# Altium PCB PCB1_Layout_Final.PcbDoc (part 1 of 2)
Units mm, origin at the board's own origin, x right, y up, seen from the top; angles counter-clockwise.
Board outline 31.5 x 45 mm, 4 copper layers (Top Layer, Ground, Power, Bottom Layer), stack 0.641 mm thick; 56 components, 34 nets, 168 pads, 132 vias.
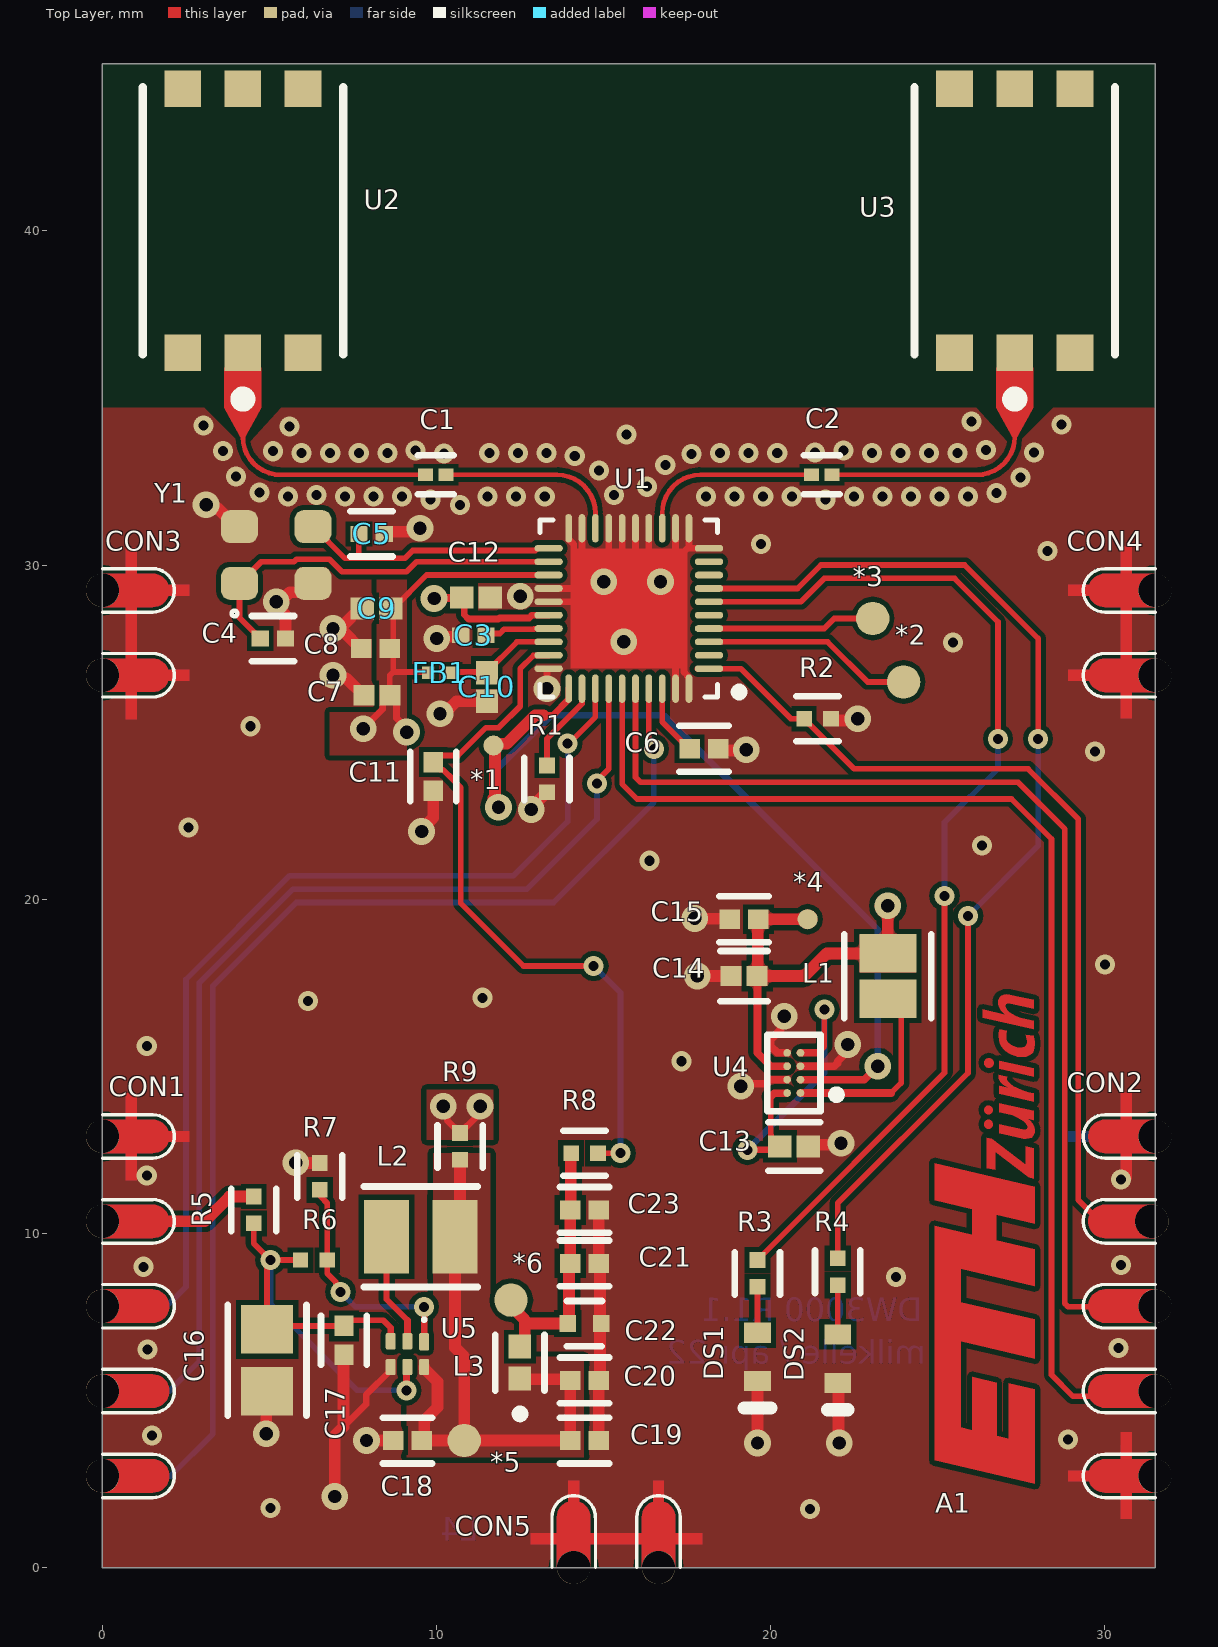
[diagram p0: Top Layer view]
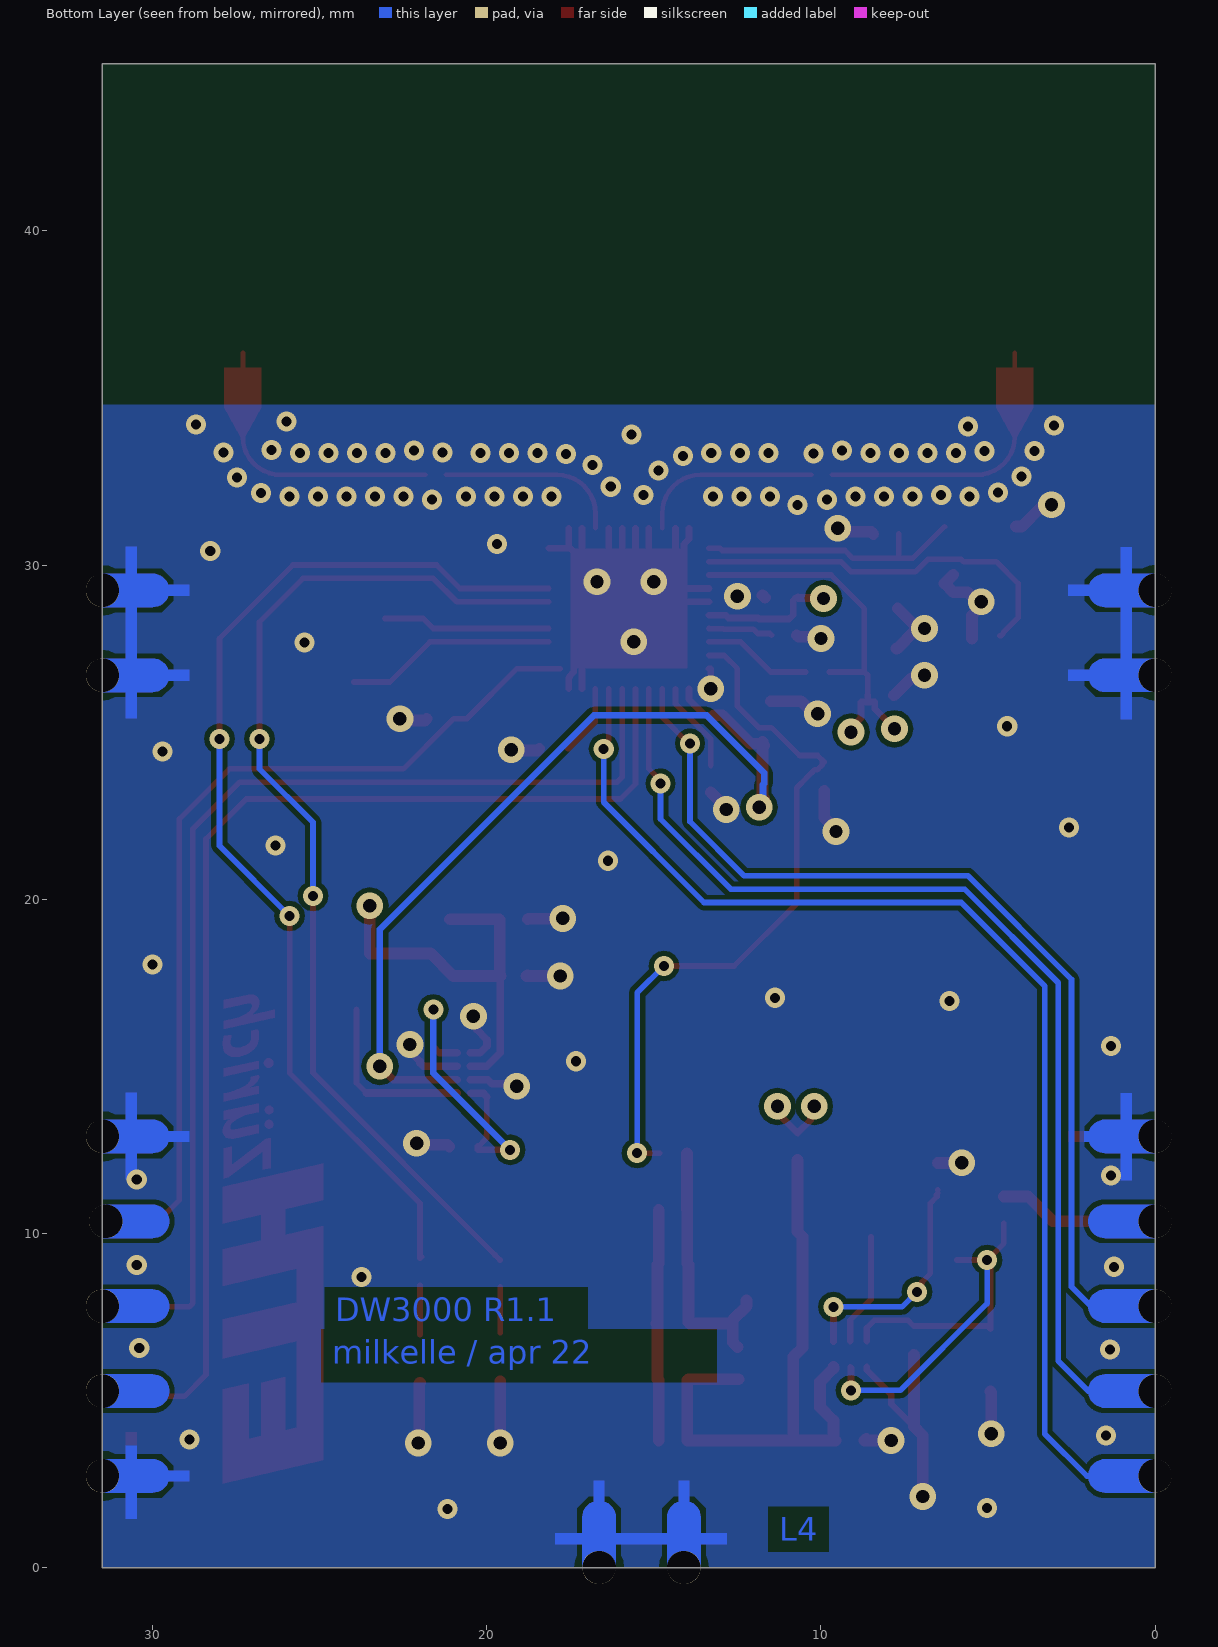
[diagram p1: Bottom Layer view, seen from below]
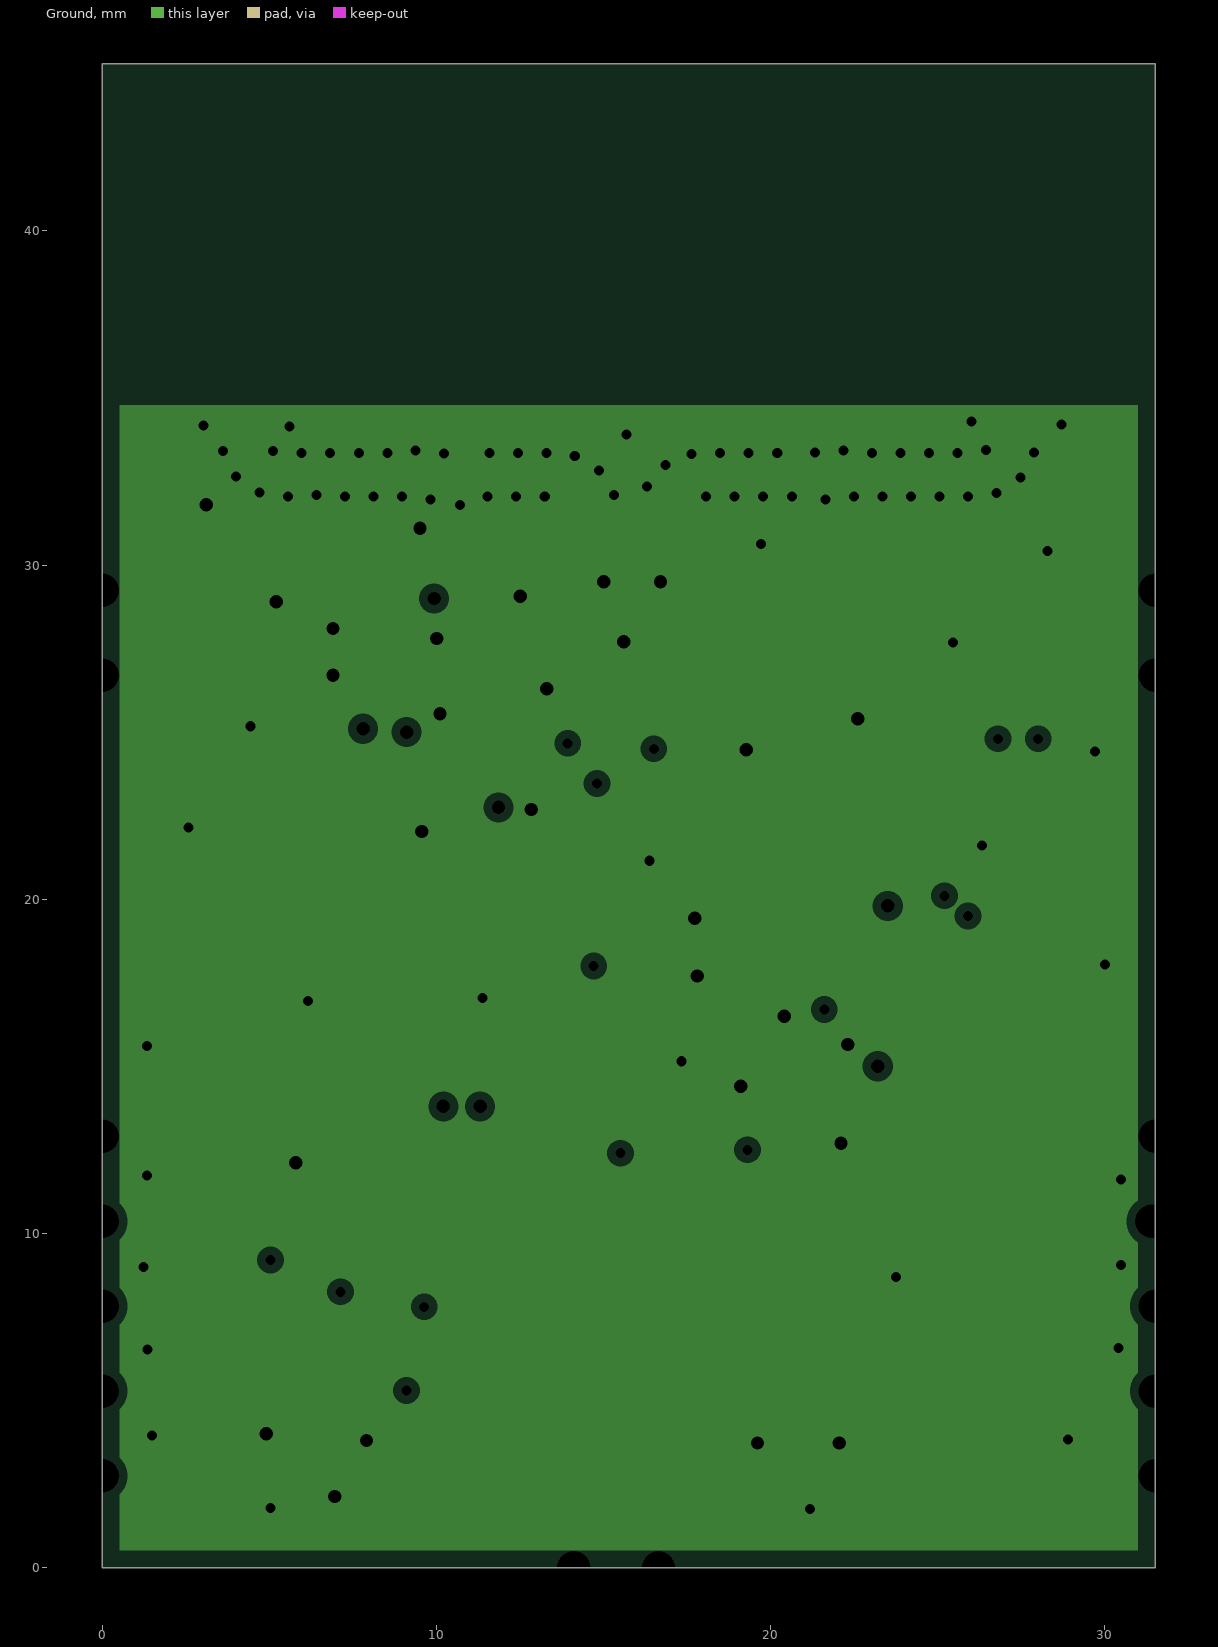
[diagram p2: Ground, clearances drawn from the general rule]
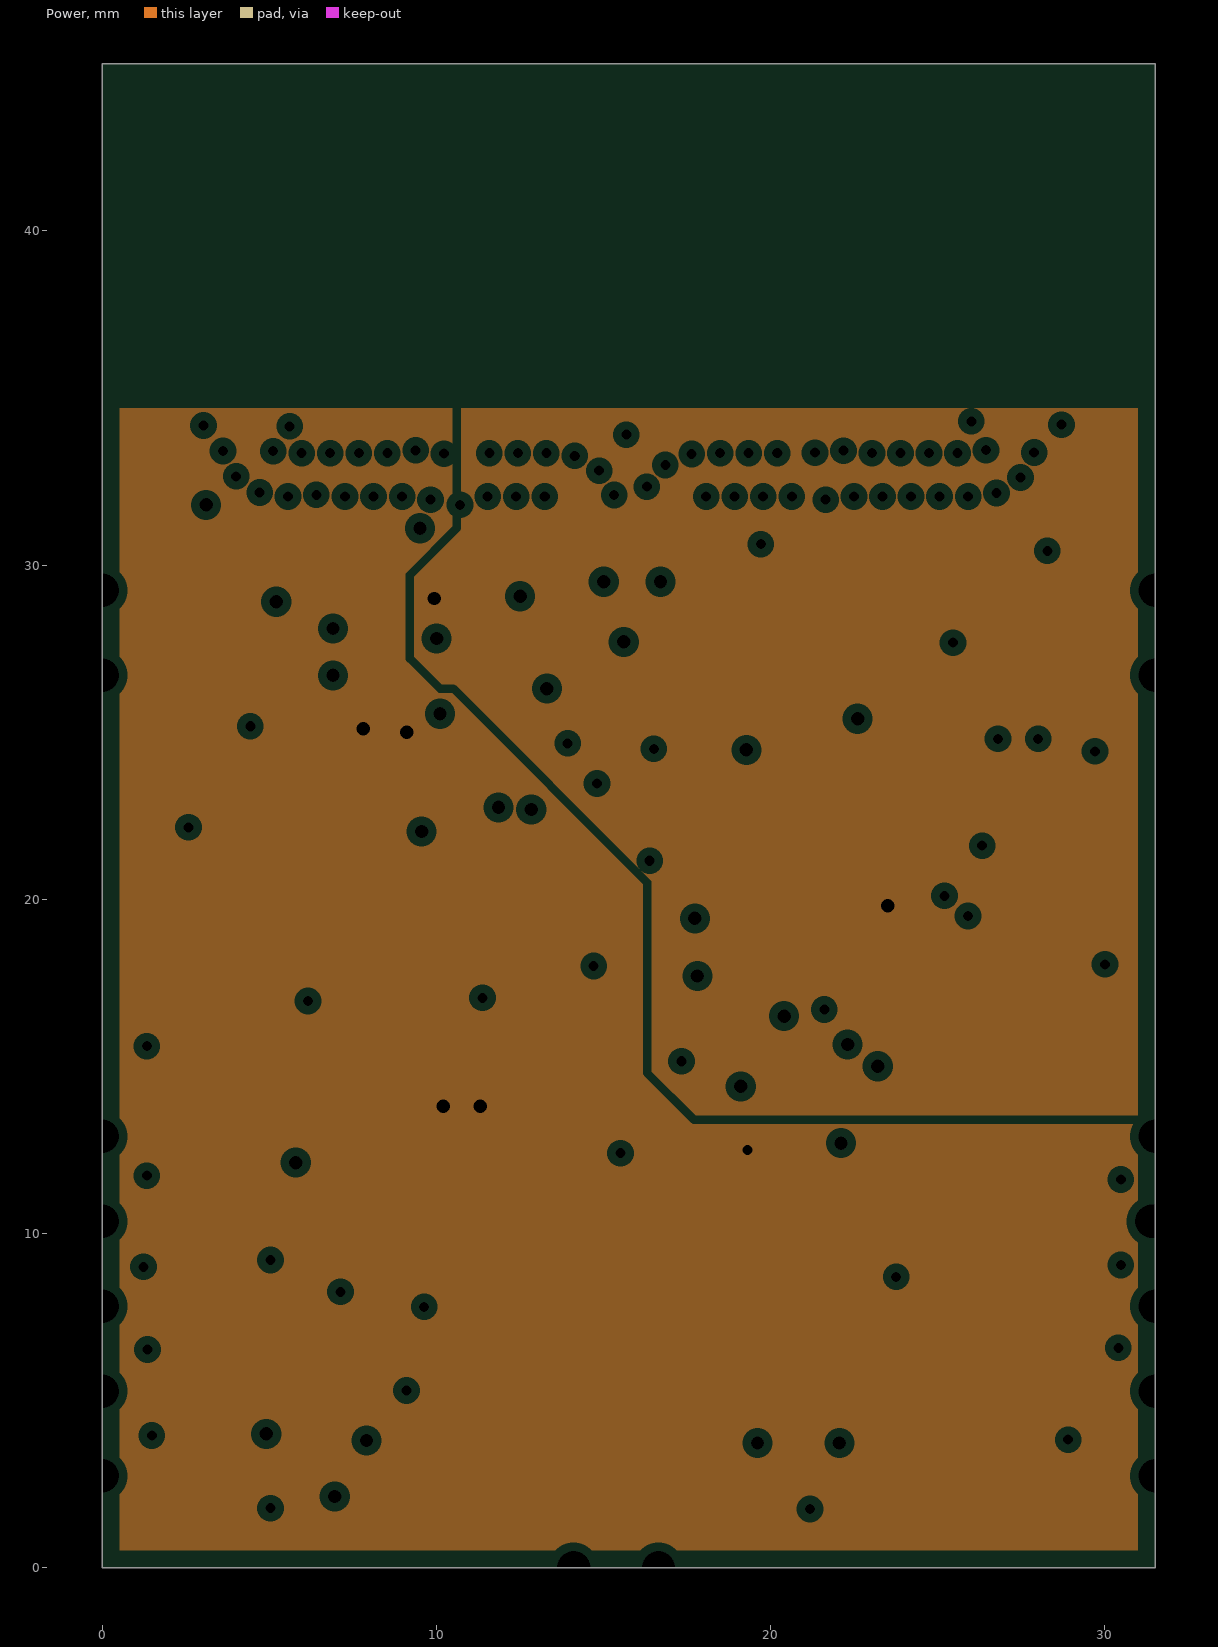
[diagram p3: Power, clearances drawn from the general rule]
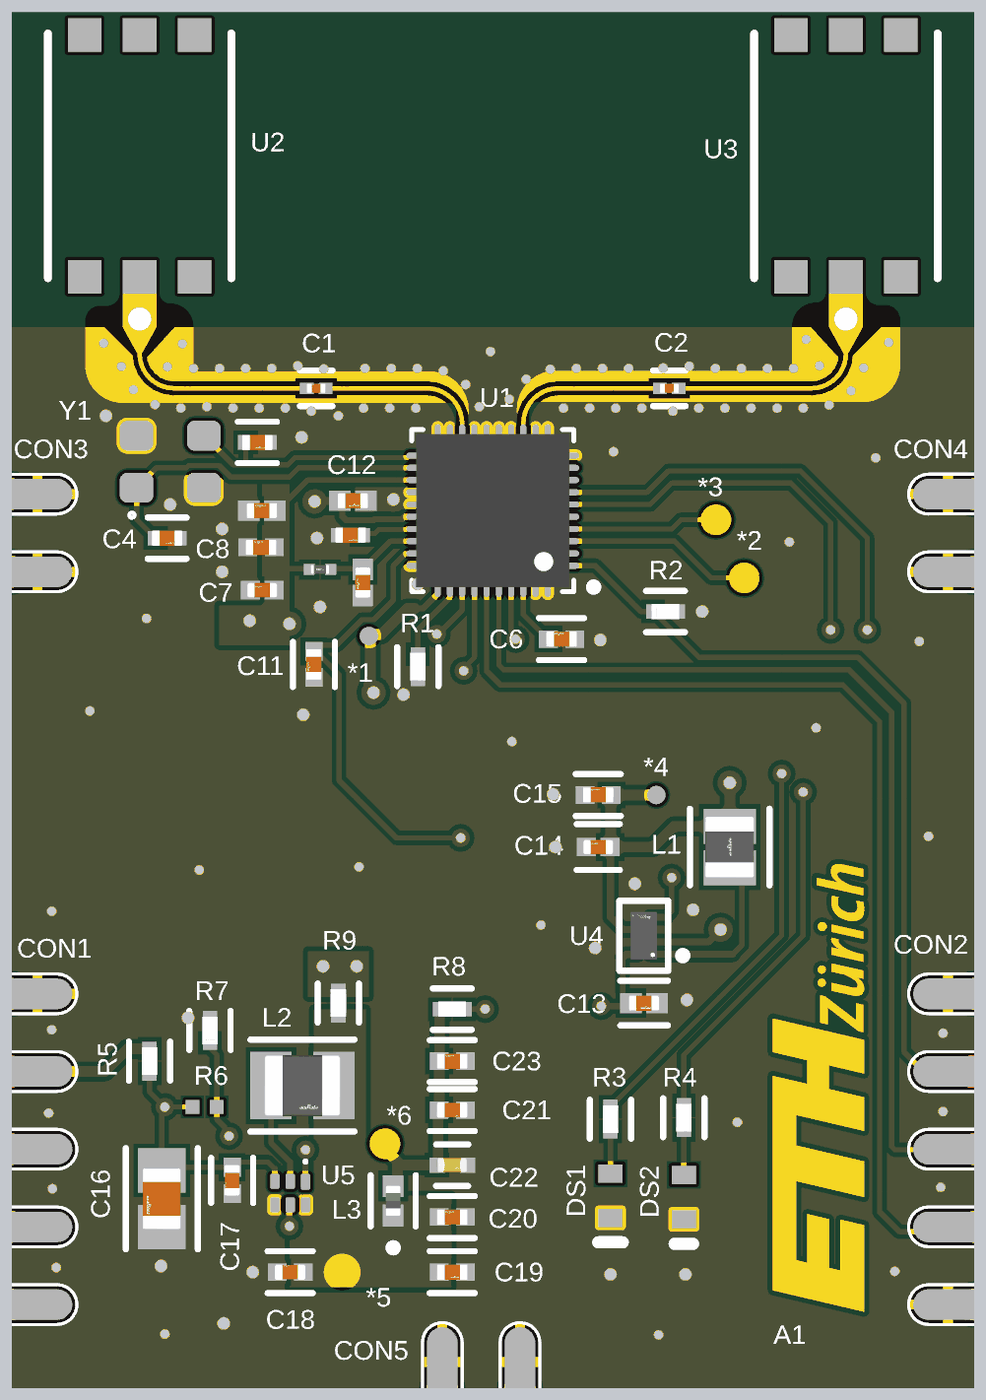
[diagram p4: 3D render of the assembled board from above, using the file's embedded part models]

## Layer stack, top to bottom
Top Solder: solder mask 0.0102, Solder Resist, Dk 3.5
Top Layer: signal copper 0.0356
Dielectric 2: prepreg 0.09, Megtron 4, Dk 3.5
Ground: plane copper 0.035, net GND
Dielectric 1: dielectric 0.32, Megtron 4, Dk 4.1
Power: plane copper 0.035, net (Multiple Nets)
Dielectric 3: prepreg 0.09, Megtron 4, Dk 3.5
Bottom Layer: signal copper 0.0356
Bottom Solder: solder mask 0.0102, Solder Resist, Dk 3.5

## Board outline
0,0 31.5,0 31.5,45 0,45

## Design rules (kind name [scope] priority, off if disabled: settings)
Clearance [All] p1: gap=0.15 ignorepadtopadclearanceinfootprint=FALSE
MinimumSolderMaskSliver [All] p1: minsoldermaskwidth=0.1
PlaneClearance [All] p1: clearance=0.25
PlaneConnect PlaneConnect_1 [All] p1: planeconnectstyle=Direct reliefexpansion=0.508 reliefentries=4 reliefconductorwidth=0.254 reliefairgap=0.254
PolygonConnect PolygonConnect_1 [All] p1: thpad.connectstyle=Relief thpad.reliefconductorwidth=0.254 thpad.reliefentries=4 thpad.polygonreliefangle="90 Angle" thpad.airgapwidth=0.254 smdpad.connectstyle=Direct smdpad.reliefconductorwidth=0.254 smdpad.reliefentries=4 smdpad.polygonreliefangle="90 Angle" smdpad.airgapwidth=0.254 via.connectstyle=Direct via.reliefconductorwidth=0.254 via.reliefentries=4 via.polygonreliefangle="90 Angle" via.airgapwidth=0.254
RoutingVias RoutingVias_Power [(InNet('AVDD') OR InNet('GND') OR InNet('VDD') OR InNet('VCOM') OR InNet('EN_VDD3') OR InNet('VDD3') OR InNet('AVDD'))] p1: holewidth=0.3 width=0.6 viastyle="Through Hole" minholewidth=0.3 minwidth=0.6 maxholewidth=0.4 maxwidth=0.8
RoutingVias [All] p2: holewidth=0.3 width=0.6 viastyle="Through Hole" minholewidth=0.3 minwidth=0.6 maxholewidth=0.3 maxwidth=0.6
SolderMaskExpansion SolderMaskExpansion_1 [IsVia] p1: expansion=0.102 istentingtop=TRUE
SolderMaskExpansion [All] p2: expansion=0.102 istentingtop=FALSE
Width RF [InNetClass('RF')] p1: maxlimit=0.2 minlimit=0.106 preferedwidth=0.153 impedanceprofiledriven=TRUE impedanceprofileid={21F144F7-80B2-48E0-8457-C32B2D776980} impedanceprofilevalue=50.000000 minimp=50.000000 maximp=50.000000 favimp=50.000000 // RF Impedance
Width Width_Power [(InNet('AVDD') OR InNet('GND') OR InNet('VDD') OR InNet('VCOM') OR InNet('EN_VDD3') OR InNet('VDD3') OR InNet('AVDD'))] p2: maxlimit=0.4 minlimit=0.2 preferedwidth=0.35
Width [All] p3: maxlimit=0.3 minlimit=0.15 preferedwidth=0.17
27 further rules are at their usual default settings.

## Classes and differential pairs
net class RF: NetC1_1 NetC1_2 NetC2_1 NetC2_2
component class DW3000: *1 *2 *3 *4 C1 C2 C3 C4 C5 C6 C7 C8 C9 C10 C11 C12 C13 C14 C15 DS1 DS2 FB1 L1 R1 R2 R3 R4 U1 U2 U3 U4 Y1
component class Deck: *5 *6 A1 C16 C17 C18 C19 C20 C21 C22 C23 CON1 CON2 CON3 CON4 CON5 L2 L3 R5 R6 R7 R8 R9 R13 TP1 TP2 U5

## Components (designator, comment, footprint, x,y, rotation, side; value= is the part's Value field where it differs from the comment)
*1 "EN_VDD3" Pad-0.6mm 11.7,24.6 r0 top
*2 "RXOK" Pad-1mm 23.975,26.5 r0 top
*3 "SFD_OK" Pad-1mm 23.05,28.4 r0 top
*4 "VDD3" Pad-0.6mm 21.1,19.4 r0 top
*5 "VDD" Pad-1mm 10.826,3.8 r0 top
*6 "AVDD" Pad-1mm 12.226,8 r90 top
A1 "Logo ETH Zurich" eth-zurich_3mm 27.9,2.5 r90 top
C1 "GJM0335C1E2R0WB01D" FP-GJM033-0_03-IPC_B 9.975,32.7 r180 top
C2 "GJM0335C1E2R0WB01D" FP-GJM033-0_03-IPC_B 21.525,32.7 r0 top
C3 "GRM155R71C224KA12D" FP-GRM155-0_05-IPC_C 11.1,27.9 r0 top
C4 "GJM1555C1H3R3BB01D" FP-GJM155-0_05-IPC_C 5.1,27.8 r0 top
C5 "GJM1555C1H3R3BB01D" FP-GJM155-0_05-IPC_C 8.052,30.931 r0 top
C6 "GRM155R71E104ME14D" FP-GRM155-0_05-IPC_B 18,24.5 r180 top
C7 "GRM155R60J106ME47D" FP-GRM155-0_2-0_1-IPC_C 8.211,26.1 r180 top
C8 "GRM155R71E104ME14D" FP-GRM155-0_05-IPC_B 8.171,27.5 r180 top
C9 "GRM1555C1H472GE01D" FP-GRM155-0_15-IPC_B 8.2,28.7 r180 top
C10 "GRM1555C1H472GE01D" FP-GRM155-0_15-IPC_B 11.5,26.35 r270 top
C11 "GRM155R71E104ME14D" FP-GRM155-0_05-IPC_B 9.9,23.671 r270 top
C12 "GRM1555C1H472GE01D" FP-GRM155-0_15-IPC_B 11.175,29.025 r0 top
C13 "GRM155C80J475MEAAD" FP-GRM155-0_15-IPC_B 20.7,12.6 r0 top
C14 "GRM155R60J106ME47D" FP-GRM155-0_2-0_1-IPC_C 19.2,17.7 r180 top
C15 "GRM155R71E104ME14D" FP-GRM155-0_05-IPC_B 19.2,19.4 r180 top
C16 "GRM21BR60J107ME15L" FP-GRM21B-0_2-e0_2_0_7-IPC_A 4.926,6.2 r270 top
C17 "GRM155R60J475ME47D" FP-GRM155-0_1-IPC_B 7.226,6.8 r270 top
C18 "GRM155R60J475ME47D" FP-GRM155-0_1-IPC_B 9.126,3.8 r180 top
C19 "GRM1555C1H102JA01D" FP-GRM155-0_05-IPC_B 14.426,3.8 r0 top
C20 "GRM155R71E104ME14D" FP-GRM155-0_05-IPC_B 14.426,5.6 r180 top
C21 "GRM155R60J475ME47D" FP-GRM155-0_1-IPC_B 14.426,9.1 r0 top
C22 "CC0402KRX7R7BB103" FP-CC0402-MFG 14.426,7.3 r0 top value="10 nF"
C23 "GRM155R71E104ME14D" FP-GRM155-0_05-IPC_B 14.426,10.7 r180 top
CON1 "Con_Pad" Cons_Pad#1 0,12.9 r270 top
CON2 "Con_Pad" Cons_Pad#2 31.5,12.9 r270 top
CON3 "Con_Pad_GND" PCBComponent_1 0,29.242 r270 top
CON4 "Con_Pad_GND" PCBComponent_1 31.5,26.7 r90 top
CON5 "Con_Pad_GND" PCBComponent_1 14.1,0 r0 top
DS1 "TLMS1100-GS08" VISH-TLMX1100_V 19.6,6.3 r270 top
DS2 "TLMY1100-GS08" VISH-TLMX1100-2_V 22,6.25 r270 top
FB1 "MPZ0603S330HT000" FP-MPZ0603-IPC_B 10.1,26.775 r0 top
L1 "1285AS-H-2R2M=P2" FP-DFE201610C-IPC_C 23.5,17.7 r90 top
L2 "LQM2HPN1R0MJ0L" FP-LQM2HPN_J0-IPC_B 9.526,9.9 r0 top
L3 "LQG15HS3N6B02D" FP-LQG15HH_02-IPC_A 12.494,6.133 r90 top
R1 "CRCW0402100KFKED" FP-CRCW0402-e3-IPC_C 13.3,23.6 r90 top
R2 "CRCW0402100KFKED" FP-CRCW0402-e3-IPC_C 21.398,25.4 r180 top
R3 "" FP-CRCW0402-e3-IPC_C 19.6,8.802 r90 top
R4 "" FP-CRCW0402-e3-IPC_C 22,8.85 r90 top
R5 "CRCW04020000Z0ED" FP-CRCW0402-e3-IPC_C 4.526,10.7 r270 top
R6 "CPF0402B47K5E1" RESC1005X35X20LL05T10 6.326,9.2 r180 top
R7 "CRCW04020000Z0ED" FP-CRCW0402-e3-IPC_C 6.5,11.702 r90 top
R8 "CRCW04020000Z0ED" FP-CRCW0402-e3-IPC_C 14.426,12.4 r180 top
R9 "CRCW04020000Z0ED" FP-CRCW0402-e3-IPC_C 10.7,12.6 r270 top
U1 "DW3220" QFN40P500X500X40_HS-40N 15.75,28.7 r180 top
U2 "AH086M555003-T" AH086M 4.2,40.3 r0 top
U3 "AH086M555003-T" AH086M 27.3,40.3 r0 top
U4 "TPS62743YFPR" FP-YFP0008-C01-MFG 20.689,14.8 r180 top
U5 "TPS62233DRYR" DRY0006A 9.126,6.385 r270 top
Y1 "8Y38472012" OSCSC320X250X100N 5.2,30.3 r90 top value="38.4 MHz"

## Footprints (in the part's own frame and the unit in brackets; to place one, negate y for a bottom-side part, rotate by r counter-clockwise, add the part's x,y. Pads: shape width x height; smd on the part's side, far side on the other; paste and mask are expansions set on the pad)
AH086M [mm] "RF ANT CHIP SLD"
  rect 1.1x1.1 smd: 1(0,-3.95) ""(-1.8,-3.95) ""(-1.8,3.95) ""(0,3.95) ""(1.8,-3.95) ""(1.8,3.95)
  silkscreen extent -3,-5.46 3,4, body extent -3,-4 3,4, height 1
Cons_Pad#1 [mm]
  round 1 hole 1: 0(0,0) 1(2.54,0) 2(5.08,0) 3(7.62,0) 4(10.16,0)
  Multi-Layer region: 2.04,0 2.04,1.5 2.09,1.717 2.228,1.891 2.429,1.987 2.651,1.987 2.852,1.891 2.99,1.717 3.04,1.5 3.04,1.5 3.04,0
  Multi-Layer region: -0.5,0 -0.5,1.5 -0.45,1.717 -0.312,1.891 -0.111,1.987 0.111,1.987 0.312,1.891 0.45,1.717 0.5,1.5 0.5,1.5 0.5,0
  Multi-Layer region: 4.58,0 4.58,1.5 4.63,1.717 4.768,1.891 4.969,1.987 5.191,1.987 5.392,1.891 5.53,1.717 5.58,1.5 5.58,1.5 5.58,0
  Multi-Layer region: 7.12,0 7.12,1.5 7.17,1.717 7.308,1.891 7.509,1.987 7.731,1.987 7.932,1.891 8.07,1.717 8.12,1.5 8.12,1.5 8.12,0
  Multi-Layer region: 9.66,0 9.66,1.5 9.71,1.717 9.848,1.891 10.049,1.987 10.271,1.987 10.472,1.891 10.61,1.717 10.66,1.5 10.66,1.5 10.66,0
  silkscreen extent -0.65,0 10.81,2.15
Cons_Pad#2 [mm]
  round 1 hole 1: 0(0,0) 1(2.54,-0.1) 2(5.08,0) 3(7.62,0) 4(10.16,0)
  Multi-Layer region: 2.04,0 2.04,-1.5 2.09,-1.717 2.228,-1.891 2.429,-1.987 2.651,-1.987 2.852,-1.891 2.99,-1.717 3.04,-1.5 3.04,-1.5 3.04,0
  Multi-Layer region: -0.5,0 -0.5,-1.5 -0.45,-1.717 -0.312,-1.891 -0.111,-1.987 0.111,-1.987 0.312,-1.891 0.45,-1.717 0.5,-1.5 0.5,-1.5 0.5,0
  Multi-Layer region: 4.58,0 4.58,-1.5 4.63,-1.717 4.768,-1.891 4.969,-1.987 5.191,-1.987 5.392,-1.891 5.53,-1.717 5.58,-1.5 5.58,-1.5 5.58,0
  Multi-Layer region: 7.12,0 7.12,-1.5 7.17,-1.717 7.308,-1.891 7.509,-1.987 7.731,-1.987 7.932,-1.891 8.07,-1.717 8.12,-1.5 8.12,-1.5 8.12,0
  Multi-Layer region: 9.66,0 9.66,-1.5 9.71,-1.717 9.848,-1.891 10.049,-1.987 10.271,-1.987 10.472,-1.891 10.61,-1.717 10.66,-1.5 10.66,-1.5 10.66,0
  silkscreen extent -0.65,-2.15 10.81,0
DRY0006A [mm] "SON, 6-Leads, Body 1.45x1mm, Pitch 0.5mm"
  rrect33% 0.52x0.3 smd: 1(-0.37,0.5)
  rrect33% 0.49x0.3 smd: 2(-0.385,0) 3(-0.385,-0.5) 4(0.385,-0.5) 5(0.385,0) 6(0.385,0.5)
  silkscreen extent -1.08,0.45 -0.98,0.55, body extent -0.5,-0.72 0.5,0.72, height 0.6
eth-zurich_3mm [mm] "Logo ETH Zurich"
  Top Layer circle w0.3: c12.598,1.372 r0.001
  Top Layer circle w0.27: c11.193,1.389 r0.001
  Top Layer circle w0.27: c10.764,1.389 r0.001
  Top Layer region: 14.118,0.96 14.118,0.96 14.049,0.879 14.2,1.562 13.955,1.562 13.614,0.024 13.86,0.024 13.95,0.433 14.001,0.555 14.061,0.663 14.121,0.759 14.181,0.822 14.229,0.855 14.277,0.879 14.313,0.879 14.349,0.867 14.373,0.843 14.379,0.807 14.379,0.759 14.373,0.717 14.219,0.024 14.486,0.024 14.601,0.555 14.644,0.753 14.649,0.843 14.637,0.927 14.613,0.999 14.565,1.047 14.505,1.083 14.457,1.095 14.361,1.095 14.265,1.071 14.181,1.023
  Top Layer region: 13.614,1.051 13.614,1.051 13.56,1.071 13.5,1.08 13.404,1.08 13.296,1.071 13.182,1.044 13.086,0.996 13.008,0.936 12.96,0.888 12.912,0.828 12.87,0.756 12.84,0.684 12.81,0.6 12.792,0.522 12.78,0.444 12.78,0.342 12.792,0.252 12.81,0.192 12.84,0.132 12.876,0.084 12.924,0.048 12.978,0.024 13.032,0.012 13.152,0 13.212,0 13.32,0.012 13.387,0.028 13.416,0.036 13.441,0.272 13.386,0.252 13.308,0.234 13.248,0.228 13.206,0.228 13.158,0.24 13.116,0.264 13.092,0.288 13.074,0.324 13.062,0.366 13.056,0.408 13.056,0.462 13.068,0.54 13.092,0.618 13.122,0.684 13.158,0.738 13.212,0.804 13.26,0.834 13.308,0.852 13.356,0.858 13.428,0.858 13.494,0.852 13.524,0.846 13.566,0.834
  Top Layer region: 12.438,0.024 12.438,0.024 12.671,1.071 12.424,1.071 12.192,0.024
  Top Layer region: 11.857,0.78 11.857,0.78 11.922,1.071 11.676,1.071 11.444,0.024 11.689,0.024 11.727,0.193 11.784,0.378 11.85,0.54 11.904,0.642 11.979,0.741 12.03,0.792 12.072,0.822 12.114,0.84 12.144,0.84 12.184,0.83 12.24,1.08 12.204,1.086 12.168,1.086 12.132,1.08 12.078,1.056 12.042,1.032 11.994,0.99 11.952,0.948 11.904,0.876
  Top Layer region: 11.166,0.024 11.166,0.024 11.398,1.071 11.121,1.071 11.031,0.661 10.98,0.54 10.92,0.432 10.86,0.336 10.8,0.273 10.752,0.24 10.704,0.216 10.668,0.216 10.632,0.228 10.608,0.252 10.602,0.288 10.602,0.336 10.608,0.378 10.763,1.071 10.496,1.071 10.38,0.54 10.336,0.342 10.332,0.252 10.344,0.168 10.368,0.096 10.416,0.048 10.476,0.012 10.524,0 10.62,0 10.716,0.024 10.8,0.072 10.863,0.135 10.932,0.216 10.89,0.024
  Top Layer region: 10.359,1.44 10.359,1.44 9.452,1.44 9.396,1.191 9.945,1.191 9.172,0.185 9.138,0.024 10.044,0.024 10.099,0.273 9.549,0.273 10.325,1.284
  Top Layer region: 8.895,0 8.895,0 9.6,3 8.493,3 8.227,1.87 7.459,1.87 7.723,3 0.705,3 0,0 1.171,0 2.838,0 3.021,0.78 1.356,0.78 1.442,1.146 3.034,1.146 3.204,1.866 1.609,1.866 1.693,2.22 4.273,2.22 3.75,0 4.923,0 5.445,2.22 6.433,2.22 5.913,0 7.02,0 7.29,1.151 8.058,1.151 7.788,0
FP-CC0402-MFG [mm]
  rect 0.5x0.5 smd paste+0 mask+0: 1(-0.5,0) 2(0.5,0)
  silkscreen extent -0.53,-0.68 0.53,0.67, body extent -0.87,-0.48 0.87,0.48, height 0.25
FP-CRCW0402-e3-IPC_C [mm]
  rect 0.468x0.472 smd paste+0 mask+0: 1(-0.402,0) 2(0.402,0)
  silkscreen extent -0.64,-0.67 0.64,0.67, body extent -0.74,-0.38 0.74,0.38, height 0.25
FP-DFE201610C-IPC_C [mm]
  rect 1.154x1.706 smd paste+0 mask+0: 1(-0.676,0) 2(0.676,0)
  silkscreen extent -1.25,-1.3 1.25,1.3, body extent -1.35,-1 1.35,1, height 0.25
FP-GJM033-0_03-IPC_B [mm]
  rect 0.454x0.363 smd paste+0 mask+0: 1(-0.304,0) 2(0.304,0)
  silkscreen extent -0.53,-0.58 0.53,0.58, body extent -0.68,-0.33 0.68,0.33, height 0.25
FP-GJM155-0_05-IPC_C [mm]
  rect 0.515x0.472 smd paste+0 mask+0: 1(-0.379,0) 2(0.379,0)
  silkscreen extent -0.64,-0.67 0.64,0.67, body extent -0.74,-0.38 0.74,0.38, height 0.25
FP-GRM21B-0_2-e0_2_0_7-IPC_A [mm]
  rect 1.455x1.556 smd paste+0 mask+0: 1(-0.926,0) 2(0.926,0)
  silkscreen extent -1.65,-1.18 1.65,1.18, body extent -2.15,-1.28 2.15,1.28, height 0.25
FP-GRM155-0_1-IPC_B [mm]
  rect 0.615x0.572 smd paste+0 mask+0: 1(-0.429,0) 2(0.429,0)
  silkscreen extent -0.74,-0.69 0.74,0.69, body extent -0.89,-0.44 0.89,0.44, height 0.25
FP-GRM155-0_2-0_1-IPC_C [mm]
  rect 0.628x0.606 smd paste+0 mask+0: 1(-0.389,0) 2(0.389,0)
  body extent -0.8,-0.45 0.8,0.45, height 0.25
FP-GRM155-0_05-IPC_B [mm]
  rect 0.615x0.572 smd paste+0 mask+0: 1(-0.429,0) 2(0.429,0)
  silkscreen extent -0.74,-0.69 0.74,0.69, body extent -0.89,-0.44 0.89,0.44, height 0.25
FP-GRM155-0_05-IPC_C [mm]
  rect 0.515x0.472 smd paste+0 mask+0: 1(-0.379,0) 2(0.379,0)
  body extent -0.74,-0.38 0.74,0.38, height 0.25
FP-GRM155-0_15-IPC_B [mm]
  rect 0.704x0.658 smd paste+0 mask+0: 1(-0.427,0) 2(0.427,0)
  body extent -0.93,-0.48 0.93,0.48, height 0.25
FP-LQG15HH_02-IPC_A [mm] "Chip Inductor, 2-Leads, Body 1.10x0.60mm, IPC Medium Density"
  rect 0.715x0.672 smd paste+0 mask+0: 1(-0.479,0) 2(0.479,0)
  silkscreen extent -1.66,-0.74 0.84,0.74, body extent -1.04,-0.54 1.04,0.54, height 0.25
FP-LQM2HPN_J0-IPC_B [mm]
  rect 1.355x2.206 smd paste+0 mask+0: 1(-1.026,0) 2(1.026,0)
  silkscreen extent -1.7,-1.5 1.7,1.5, body extent -1.95,-1.35 1.95,1.35, height 0.25
FP-MPZ0603-IPC_B [mm]
  rect 0.363x0.363 smd paste+0 mask+0: 1(-0.35,0) 2(0.35,0)
  body extent -0.68,-0.33 0.68,0.33, height 0.25
FP-YFP0008-C01-MFG [mm]
  round 0.23 smd paste-1000 mask+0: A1(-0.2,0.6) A2(0.2,0.6) B1(-0.2,0.2) B2(0.2,0.2) C1(-0.2,-0.2) C2(0.2,-0.2) D1(-0.2,-0.6) D2(0.2,-0.6)
  silkscreen extent -1.4,-1.15 0.8,1.15, body extent -0.95,-1.3 0.95,1.3, height 0.25
OSCSC320X250X100N [mm]
  rrect53% 0.98x1.1 smd: 1(-0.85,1.1) 2(-0.85,-1.1) 3(0.85,-1.1) 4(0.85,1.1)
  silkscreen extent -1.84,1.16 -1.66,1.34
Pad-0.6mm [mm] "SMT Test Pad"
  round 0.6 smd: 1(0,0)
Pad-1mm [mm] "SMT Test Pad"
  round 1 smd paste-5: 1(0,0)
PCBComponent_1 [mm]
  round 1 hole 1: 0(0,0) 1(2.54,0)
  Multi-Layer region: -0.5,0 -0.5,1.5 -0.45,1.717 -0.312,1.891 -0.111,1.987 0.111,1.987 0.312,1.891 0.45,1.717 0.5,1.5 0.5,1.5 0.5,0
  Multi-Layer region: 2.04,0 2.04,1.5 2.09,1.717 2.228,1.891 2.429,1.987 2.651,1.987 2.852,1.891 2.99,1.717 3.04,1.5 3.04,1.5 3.04,0
  silkscreen extent -0.65,0 3.19,2.15
QFN40P500X500X40_HS-40N [mm] "QFN, 40-Leads, Body 5x5mm, Pitch 0.4mm, IPC Medium Density"
  oval 0.85x0.2 smd: 1(-2.4,1.8) 2(-2.4,1.4) 3(-2.4,1) 4(-2.4,0.6) 5(-2.4,0.2) 6(-2.4,-0.2) 7(-2.4,-0.6) 8(-2.4,-1) 9(-2.4,-1.4) 10(-2.4,-1.8) 21(2.4,-1.8) 22(2.4,-1.4) 23(2.4,-1) 24(2.4,-0.6) 25(2.4,-0.2) 26(2.4,0.2) 27(2.4,0.6) 28(2.4,1) 29(2.4,1.4) 30(2.4,1.8)
  oval 0.2x0.85 smd: 11(-1.8,-2.4) 12(-1.4,-2.4) 13(-1,-2.4) 14(-0.6,-2.4) 15(-0.2,-2.4) 16(0.2,-2.4) 17(0.6,-2.4) 18(1,-2.4) 19(1.4,-2.4) 20(1.8,-2.4) 31(1.8,2.4) 32(1.4,2.4) 33(1,2.4) 34(0.6,2.4) 35(0.2,2.4) 36(-0.2,2.4) 37(-0.6,2.4) 38(-1,2.4) 39(-1.4,2.4) 40(-1.8,2.4)
  silkscreen extent -3.43,-2.65 2.65,2.65, body extent -2.5,-2.5 2.5,2.5, height 0.5
RESC1005X35X20LL05T10 [mm] "Chip Resistor, 2-Leads, Body 1.00x0.50mm, IPC High Density"
  rect 0.45x0.45 smd: 1(-0.4,0) 2(0.4,0)
  body extent -0.53,-0.27 0.53,0.28, height 0.35
VISH-TLMX1100-2_V [mm] "SMD, 2-Leads, Body 1.6x0.8mm"
  rect 0.6x0.8 smd: 1(-0.725,0) 2(0.725,0)
  silkscreen extent 1.53,-0.3 1.53,0.3, body extent -0.8,-0.4 0.8,0.4, height 0.65
VISH-TLMX1100_V [mm] "SMD, 2-Leads, Body 1.6x0.8mm"
  rect 0.6x0.8 smd: 1(-0.725,0) 2(0.725,0)
  silkscreen extent 1.53,-0.4 1.53,0.4, body extent -0.8,-0.4 0.8,0.4, height 0.65

## Part data
*1 *4: library part CMP-00224-1, "0.6mm SMT Test Pad", Mounting Technology=SMT
*2 *3 *5 *6: library part CMP-01283-1, "1mm SMT Test Pad", Mounting Technology=SMT
A1: library part CMP-00038-1
C1 C2: library part CMP-2010-00751-2, "Ceramic Capacitor 2pF ±0.05pF 25V C0G 0201 (0603 Metric)", Capacitance=2pF, Case Code (Imperial)=0201, Case Code (Metric)=0603, Dielectric=C0G, Max Operating Temperature=125°C, Min Operating Temperature=-55°C, Package Quantity=15000, Voltage Rating=25V, Case/Package=0201, Depth=0.3mm, Height=0.3mm, Length=0.6mm, Mount="Surface Mount", Packaging="Tape and Reel", Radiation Hardening=No, Termination=SMD/SMT, Thickness=0.013inch, Voltage Rating (DC)=25V, Width=0.012inch
C3: library part CMP-1034-02089-3, "Chip Multilayer Ceramic Capacitors for General Purpose, 0402, 0.22uF, X7R, 15%, 10%, 16V", Capacitance=220nF, Case/Package=0402, Case Code (Metric)=1005, Dielectric=X7R, Max Operating Temperature=125°C, Min Operating Temperature=-55°C, Package Quantity=1, Tolerance=10%, Voltage=16V, Case Code (Imperial)=0402, Depth=0.5mm, Height=0.5mm, Lead Free="Lead Free", Length=1mm, Material=Ceramic, Mount="Surface Mount", Packaging="Tape and Reel", Radiation Hardening=No, REACH SVHC="No SVHC", Termination=SMD/SMT, Thickness=0.022inch, Voltage Rating=16V, Voltage Rating (DC)=16V, Width=0.02inch
C4 C5: library part CMP-2008-03846-2, "Multi-Layer Ceramic Capacitor 3.3pF C0G  ±0.1pF 0402 Paper T/R", Capacitance=3.3pF, Case Code (Imperial)=0402, Case Code (Metric)=1005, Dielectric=C0G, Max Operating Temperature=125°C, Min Operating Temperature=-55°C, Package Quantity=1, Voltage=50V, Case/Package=0402, Depth=0.5mm, Height=0.5mm, Lead Free="Lead Free", Lead Pitch=0.3mm, Length=1mm, Mount="Surface Mount", Number of Pins=2, Packaging="Tape and Reel", Radiation Hardening=No, REACH SVHC="No SVHC", Termination=SMD/SMT, Thickness=0.022inch, Voltage Rating=50V, Voltage Rating (DC)=50V, Width=0.5mm
C6 C8 C11 C15 C20 C23: library part CMP-06035-053616-1, "Chip Multilayer Ceramic Capacitors for General Purpose, 0402, 0.10uF, X7R, 15%, 20%, 25V", Capacitance=100nF, Case/Package=0402, Case Code (Metric)=1005, Dielectric=X7R, Max Operating Temperature=125°C, Min Operating Temperature=-55°C, Package Quantity=10000, Resistor Type=Ceramic, Tolerance=20%, Voltage Rating=25V, Case Code (Imperial)=0402, Depth=0.5mm, Height=0.5mm, Lead Free="Lead Free", Length=1mm, Material=Ceramic, Mount="Surface Mount", Packaging="Tape and Reel", Termination=SMD/SMT, Thickness=0.022inch, Voltage Rating (DC)=25V, Weight=0.000212oz, Width=0.5mm
C7 C14: library part CMP-06035-022355-1, "Chip Multilayer Ceramic Capacitors for General Purpose, 0402, 10uF, X5R, 15%, 20%, 6.3V", Capacitance=10uF, Case Code (Imperial)=0402, Case Code (Metric)=1005, Dielectric=X5R, Max Operating Temperature=85°C, Min Operating Temperature=-55°C, Tolerance=20%, Voltage Rating=6.3V, Case/Package=0402, Length=0.039inch, Mount="Surface Mount", Packaging="Tape and Reel", Thickness=0.024inch, Voltage Rating (DC)=6.3V, Width=0.02inch
C9 C10 C12: library part CMP-06035-019672-1, "Chip Multilayer Ceramic Capacitors for General Purpose, 0402, 4700pF, C0G, 30ppm/°C, 2%, 50V", Parameter 1="4.7 nF"
C13: library part CMP-06035-032730-1, "Chip Multilayer Ceramic Capacitors for General Purpose, 0402, 4.7uF, X6S, 22%, 20%, 6.3V", Capacitance=4.7uF, Dielectric=X6S, Tolerance=20%, Voltage Rating (DC)=6.3V, Length=1mm, Thickness=500um, Width=500um
C16: library part CMP-2000-07599-2, "Chip Multilayer Ceramic Capacitors for General Purpose, 0805, 100uF, X5R, 15%, 20%, 6.3V", Capacitance=100uF, Case/Package=0805, Case Code (Metric)=2012, Dielectric=X5R, Max Operating Temperature=85°C, Min Operating Temperature=-55°C, Tolerance=20%, Voltage Rating=6.3V, Case Code (Imperial)=0805, Lead Free="Lead Free", Length=0.079inch, Mount="Surface Mount", Packaging="Cut Tape", REACH SVHC="No SVHC", Thickness=0.057inch, Voltage Rating (DC)=6.3V, Width=0.049inch
C17 C18 C21: library part CMP-2008-04549-2, "Chip Multilayer Ceramic Capacitors for General Purpose, 0402, 4.7uF, X5R, 15%, 20%, 6.3V", Capacitance=4.7uF, Case/Package=0402, Case Code (Metric)=1005, Dielectric=X5R, Max Operating Temperature=85°C, Min Operating Temperature=-55°C, Package Quantity=10000, Tolerance=20%, Voltage=6.3V, Case Code (Imperial)=0402, Contact Plating=Tin, Depth=0.5mm, Height=0.5mm, Lead Free="Lead Free", Length=1mm, Mount="Surface Mount", Packaging="Tape and Reel", REACH SVHC="No SVHC", Termination=SMD/SMT, Thickness=0.022inch, Voltage Rating=6.3V, Voltage Rating (DC)=6.3V, Weight=0.000212oz, Width=0.02inch
C19: library part CMP-2008-04254-2, "Chip Multilayer Ceramic Capacitors for General Purpose, 0402, 1000pF, C0G, 30ppm/°C, 5%, 50V", Capacitance=1nF, Case/Package=0402, Case Code (Metric)=1005, Dielectric=C0G, Dielectric Material=Ceramic, Insulation Resistance=10GR, Max Operating Temperature=125°C, Min Operating Temperature=-55°C, Package Quantity=1, Temperature Coefficient=30ppm/°C, Tolerance=5%, Voltage=50V, Case Code (Imperial)=0402, Depth=0.5mm, Height=0.5mm, Lead Free="Lead Free", Length=1mm, Material=Ceramic, Mount="Surface Mount", Number of Pins=2, Packaging="Tape and Reel", Radiation Hardening=No, REACH SVHC="No SVHC", Termination=SMD/SMT, Thickness=0.022inch, Voltage Rating=50V, Voltage Rating (DC)=50V, Width=0.5mm
C22: library part CMP-03422-000501-1, "CAP CER 10000PF 16V X7R 0402", Capacitance="10 nF", Manufacturer=YAGEO, Package=CC0402, Temperature="-55°C to +125°C", Temperature Characteristic=X7R, Temperature Coefficient=30ppm/°C, Temperature Range High=+125°C, Temperature Range Low=-55°C, Tolerance=0.1, Voltage Rating="16 V", Automotive=No, Automotive Grade=NA, Category=Cap, ComponentLink2Description=Datasheet, ComponentLink2URL=http://www.yageo.com/documents/recent/UPY-GP_NP0_16V-to-50V_16.pdf, Device Class L1="Passive Components", Device Class L2=Capacitors, Device Class L3="Ceramic Capacitors", Digikey Description="CAP CER 10000PF 16V X7R 0402", Footprint Url=http://www.yageo.com/exep/pages/download/literatures/UPY-C_GEN_24.pdf, Height=0.55mm, Ipc Land Pattern Name=CAPC10050X50, Lead Free=Yes, Manufacturer Part Number=CC0402KRX7R7BB103, Material=Ceramic, Mouser Description="0402 10 nF 16 V ±10 % Tolerance X7R SMT Multilayer Ceramic Capacitor", Octopart=https://octopart.com/cc0402krx7r7bb103-yageo-192895, RoHS=TRUE
DS1: library part CMP-1666-00027-1, "LED, RED, 2.1 V, -40 to 100 degC, 2-Pin SMD (0603), RoHS, Tape and Reel", Capacitance="12 pF", Case/Package=0603, Case Code (Metric)=1608, Max Operating Temperature=125degC, Min Operating Temperature=-55degC, Package Quantity=4000, Resistance="100000000000 Ohm", Tolerance=5%, Type (Capacitors)=C0G, Voltage Rating="50 V", Case Code (Imperial)=0603, ComponentLink1Description="Manufacturer URL", ComponentLink1URL=http://www.vishay.com/, ComponentLink2Description=Datasheet, ComponentLink2URL=http://www.vishay.com/docs/83173/tlmb1100.pdf, DatasheetVersion="Rev. 2.7, 03/2016", Height="0.8 mm", Length="1.6 mm", Mount="Surface Mount", PackageDescription="2-Pin Surface Mount Device, Body 1.6 x 0.8 mm", PackageReference=TLMX1100, Packaging="Tape and Reel", Pins=2, Radiation Hardening=No, REACH SVHC="No SVHC", RoHSCompliant=True, Voltage Rating (DC)="50 V", Width="0.8 mm"
DS2: library part CMP-1666-00030-1, "Yellow LED, 20 mA, 2.1 V, -40 to 100 degC, 2-Pin SMD (0603), RoHS, Tape and Reel", ComponentLink1Description="Manufacturer URL", ComponentLink1URL=http://www.vishay.com/, ComponentLink2Description=Datasheet, ComponentLink2URL=http://download.siliconexpert.com/pdfs/2016/8/7/12/43/26/667/vsh_/manual/379263299541529tlmb1100.pdf, DatasheetVersion="Rev. 2.7, 03/2016", PackageDescription="2-Pin Surface Mount Device, Body 1.6 x 0.8 mm", PackageReference=0603
FB1: library part CMP-08257-000038-1, "CHIP BEADS FOR GENERAL SIGNAL LI", Case Code (Imperial)=0201, Case Code (Metric)=0603, DC Resistance (DCR)=50mR, Max Current Rating=1.6A, Max Operating Temperature=125°C, Min Operating Temperature=-55°C, Case/Package=0201, Mount="Surface Mount", Number of Lines=1, Packaging="Cut Tape", RoHS Compliant=Yes
L1: library part CMP-06042-000201-1, "Shielded Wirewound Inductor 2.2uH 20% 1200mA 0.204Ω 0806 (2016)", Case Code (Imperial)=0805, Case Code (Metric)=2012, Current Rating=1.5A, DC Resistance (DCR)=204mR, Inductance=2.2uH, Max DC Current=1.2A, Max Operating Temperature=85°C, Min Operating Temperature=-40°C, Resistor Type=Wirewound, Test Frequency=1MHz, Tolerance=20%, Case/Package=0805, Core Material=Ferrite, Depth=1.6mm, Height - Seated (Max)=0.039inch, Length=0.079inch, Mount="Surface Mount", Packaging="Tape and Reel", Shielding=Shielded, Width=0.063inch
L2: library part CMP-1662-00025-2, "FIXED IND 1UH 1.5A 90 MOHM SMD", Case/Package=1008, Case Code (Metric)=2520, Current=150mA, Current Rating=1.5A, DC Resistance (DCR)=3.5R, Inductance=1uH, Inductance Tolerance=20%, Max Operating Temperature=125°C, Min Operating Temperature=-40°C, Package Quantity=3000, Self Resonant Frequency=70MHz, Test Frequency=1MHz, Case Code (Imperial)=1008, Core Material=Ferrite, DC Current=1.5A, Depth=2.2mm, Height=1.1mm, Lead Free="Lead Free", Length=2.5mm, Max DC Current=1.5A, Military Standard=Not, Mount="Surface Mount", Packaging="Tape and Reel", Radiation Hardening=No, REACH SVHC="No SVHC", RoHS Compliant=Yes, Series=LQM2HP_J0, Shielding=Shielded, Termination=SMD/SMT, Tolerance=20%, Width=2mm
L3: library part CMP-06042-005542-1, "Multilayer type RF Inductor 3.6nH ±0.1nH 0.14Ω 750mA 0402"
R1 R2: library part CMP-2002-08123-3, "RES Thick Film, 100kΩ, 1%, 0.063W, 100ppm/°C, 0402", Case/Package=0402, Case Code (Metric)=1005, Max Operating Temperature=155°C, Max Power Dissipation=63mW, Min Operating Temperature=-55°C, Package Quantity=10000, Resistance=100kR, Temperature Coefficient=100ppm/°C, Tolerance=1%, Voltage Rating=50V, Case Code (Imperial)=0402, Composition="Thick Film", Contact Plating=Tin, Depth=0.5mm, Features="Automotive AEC-Q200", Height=0.35mm, Lead Free="Lead Free", Length=1mm, Military Standard=Not, Mount="Surface Mount", Number of Pins=2, Number of Terminations=2, Packaging="Tape and Reel", Power Rating=63mW, Radiation Hardening=No, Termination=SMD/SMT, Voltage Rating (DC)=50V, Weight=2.3E-05oz, Width=0.02inch
R3 R4: library part CMP-2002-08123-3, "RES Thick Film, 3.3kΩ, 1%, 0.063W, 100ppm/°C, 0402", Case/Package=0402, Case Code (Metric)=1005, Max Operating Temperature=155°C, Max Power Dissipation=63mW, Min Operating Temperature=-55°C, Package Quantity=10000, Resistance=3.3k, Temperature Coefficient=100ppm/°C, Tolerance=1%, Voltage Rating=50V, Case Code (Imperial)=0402, Composition="Thick Film", Contact Plating=Tin, Depth=0.5mm, Features="Automotive AEC-Q200", Height=0.35mm, Lead Free="Lead Free", Length=1mm, Military Standard=Not, Mount="Surface Mount", Number of Pins=2, Number of Terminations=2, Packaging="Tape and Reel", Power Rating=63mW, Radiation Hardening=No, Termination=SMD/SMT, Voltage Rating (DC)=50V, Weight=2.3E-05oz, Width=0.02inch
R5 R8 R9: library part CMP-2002-08122-2, "RES Thick Film, 0Ω, 0.063W, 0402", Case/Package=0402, Case Code (Metric)=1005, Max Operating Temperature=155°C, Max Power Dissipation=63mW, Min Operating Temperature=-55°C, Package Quantity=1, Resistance=0mR, Temperature Coefficient=100ppm/°C, Tolerance=5%, Voltage Rating=50V, Case Code (Imperial)=0402, Composition="Thick Film", Contact Plating=Tin, Depth=0.5mm, Features="Automotive AEC-Q200", Height=0.35mm, Lead Free="Lead Free", Length=1mm, Military Standard=Not, Mount="Surface Mount", Number of Terminations=2, Packaging="Tape and Reel", Power Rating=63mW, Radiation Hardening=No, Termination=SMD/SMT, Voltage Rating (DC)=50V, Weight=2.3E-05oz, Width=0.5mm
R6: library part CMP-2002-03309-1, "47.5k, CPF0402B47K5E1", Manufacturer="TE Connectivity / AMP", Part Number=CPF0402B47K5E1
R7: library part CMP-2002-08122-2, "RES Thick Film, 0Ω, 0.063W, 0402", Case Code (Imperial)=0402, Case Code (Metric)=1005, Max Operating Temperature=155°C, Max Power Dissipation=63mW, Min Operating Temperature=-55°C, Package Quantity=1, Resistance=0mR, Temperature Coefficient=100ppm/°C, Tolerance=5%, Voltage Rating=50V, Case/Package=0402, Composition="Thick Film", Contact Plating=Tin, Depth=0.5mm, Features="Automotive AEC-Q200", Height=0.35mm, Lead Free="Lead Free", Length=1mm, Military Standard=Not, Mount="Surface Mount", Number of Terminations=2, Packaging="Tape and Reel", Power Rating=63mW, Radiation Hardening=No, Termination=SMD/SMT, Voltage Rating (DC)=50V, Weight=2.3E-05oz, Width=0.5mm
U1: library part CMP-01416-1, "Ultra-low power Wi-Fi 802.11b/g/n, without mounted antenna", Manufacturer=Qorvo, Package Type=QFN, Package(mm)="5 x 5", Voltage(V)="2.4 to 3.6", 802.15 Standards="4a, 4z-BPRF", Angle of Arrival(degrees)="< 5", Antenna Ports(#)=2, BOM Ext Components(#)=10, Data Rate="850 kbps, 6.8 Mbps", Interface=SPI, MCU=External, Part # Aliases=DWM3000, PDoA Support=Yes, Product Type="RF Transceiver", Ranging Accuracy(cm)="< 10", Security Features="4z Compliant + AES", Series=DWM3000, Subcategory="Wireless & RF Integrated Circuits", UWB Channels="5, 9"
U2 U3: library part CMP-00997-1, "3.5GHz, 5.6GHz WiMax™ Chip RF Antenna 3.1GHz ~ 8GHz 2.6dBi, 0.7dBi Solder Surface Mount", Frequency=5.55GHz, Max Frequency=8GHz, Max Operating Temperature=80°C, Min Operating Temperature=-20°C, Package Quantity=1, Height=0.039inch, Impedance=50R, Length=8mm, Mount="Surface Mount", Number of Bands=1, Packaging="Tape and Reel", Radiation Hardening=No, REACH SVHC=Unknown, Termination=Solder, Width=6mm
U4: library part CMP-04918-000507-1, "IC REG BUCK PROG 300MA 8DSBGA", Max Input Voltage=5.5V, Max Operating Temperature=85°C, Max Output Voltage=3.3V, Min Input Voltage=2.15V, Min Operating Temperature=-40°C, Min Output Voltage=1.2V, Output Current=300mA, Quiescent Current=300nA, Switching Frequency=1.2MHz, Lead Free="Lead Free", Mount="Surface Mount", Number of Outputs=1, Output Configuration=Positive, Packaging="Tape and Reel", RoHS Compliant=Yes, Synchronous Rectifier=Yes
U5: library part CMP-0323-00281-3, "Buck Step Down Regulator with 2.05 to 6 V Input and 3 V Output, -40 to 85 degC, 6-Pin SON (DRY), Green (RoHS & no Sb/Br)", Manufacturer="Texas Instruments", Rating=Catalog, Switch Current Limit(Typ)(A)=0.84, ComponentLink1Description=Datasheet, ComponentLink1URL=http://www.ti.com/general/docs/lit/getliterature.tsp?genericPartNumber=TPS62233&fileType=pdf, ComponentLink2Description="Package Specification", ComponentLink2URL=http://www.ti.com/litv/pdf/mpds221e, ComponentLink3Description="URL Link1", ComponentLink3URL="Samples URL:http://www.ti.com/product/tps62233#samples", DatasheetVersion=SLVS941E, Duty Cycle(Max)(%)=100, Eco-Plan="Green (RoHS & no Sb/Br)", Iout(Max)(A)=0.5, Iq(Typ)(mA)=0.022, Mounting Technology="Surface Mount", PackageDescription="6-Pin Plastic Small Outline No-Lead, 1 x 1.45 x 0.6 mm Body, 0.5 mm Pitch", PackageReference=DRY0006A, PackageVersion="revF, Dec-2011", PartNumber=TPS62233DRYR, Preset Vout(V)=3, Regulated Outputs(#)=1, SubFamily="Step-Down Regulator", Synchronous Rectification=False, Topology=Buck, Vin(Max)(V)=6, Vin(Min)(V)=2.05, Vout(Max)(V)=3, Vout(Min)(V)=3
Y1: library part ABM8G-14.31818MHZ-B4Y-T, "Crystal 38.4MHz ±10ppm (Stability) 10pF FUND 80Ohm 4-Pin Mini-CSMD T/R", Package=None, Availability=Unavailable, ComponentLink1Description=Digikey, ComponentLink1URL=https://www.digikey.ch/en/products/detail/txc-corporation/8Y38472012/10492155, MP=8Y38472012, Price=None

## Via types
v1: diameter 0.6, hole 0.3, Top Layer to Bottom Layer, tented both sides, 96 vias
v2: diameter 0.8, hole 0.4, Top Layer to Bottom Layer, tented both sides, 36 vias

## Nets (pads, with @x,y where several pads share a name; then routed paths per layer and width w, separated by ;. In a path a pad name is that pad's centre, name@x,y a point inside that pad or via, vN(x,y) a via of type N, cw(c..) or ccw(c..) an arc to the next point about the centre after c; other vN are vias at no path point)
AVDD: *6.1 C21.1 C22.1 C23.2 L3.2 R8.2 | length 8
  Top Layer w0.35: *6.1 12.226,7.824 12.639,7.411 12.639,6.738 12.499,6.598 L3.2@12.494,6.598 ; 12.639,7.3 C22.1@13.851,7.3 ; C22.1 13.961,7.336 13.961,9.064 C21.1 C23.2 14.01,10.713 R8.2@14.01,12.387
CS: CON1.4 U1.37 | length 36.2
  Top Layer w0.17: U1.37 16.35,24.766 16.5,24.616 v1(16.5,24.5)
  Bottom Layer w0.17: CON1.4 2.04,2.74 3.3,4 3.3,17.4 5.8,19.9 13.5,19.9 16.5,22.9 v1(16.5,24.5)
EN_VDD3: *1.1 U1.31 U4.B1 | length 27.7
  Top Layer w0.2: 13.2,25.5 13.475,25.5 13.95,25.975 U1.31
  Top Layer w0.23: U4.B1 22.8,14.6 v2(23.2,15)
  Top Layer w0.35: *1.1 11.748,24.648 12.098,24.648 12.95,25.5 13.2,25.5 ; *1.1@11.748,24.715 11.748,23.07 11.7,23.022 11.85,22.872 v2(11.85,22.75)
  Bottom Layer w0.2: v2(11.85,22.75) 11.735,22.865 11.735,23.427 11.7,23.462 11.7,23.783 13.417,25.5 16.8,25.5 18.1,24.2 23.2,19.1 v2(23.2,15)
GND: C3.1 C4.2 C5.2 C6.1 C7.2 C8.2 C9.2 C10.2 C11.2 C12.2 C13.2 C14.2 C15.2 C16.2 C17.2 C18.2 C19.2 C20.1 C21.2 C22.2 C23.1 CON1.0 CON2.0 CON2.4 CON3.0 CON3.1 CON4.0 CON4.1 CON5.0 CON5.1 DS1.2 DS2.2 R1.1 R2.1 R7.2 U1.10 U1.11 U1.12 U1.14 U1.15 U1.16 U1.17 U1.19 U1.20 U1.24 U1.25 U1.30 U1.39 U1.40 U4.B2 U4.C1 U4.D2 U5.4 Y1.2 Y1.4 | length 60.9
  Top Layer w0.2: 7.213,4.213 7.894,4.894 7.894,5.174 8.626,5.905 U5.4 ; v2(13.3,26.3) 13.3,26.9 U1.30 ; U1.25 13.675,28.9 14.3,28.9 14.3,29.3 U1.24 ; U1.20 13.95,30.775 14.1,30.625 14.1,30.4 14.35,30.4 ; 14.3,30.1 14.35,30.15 14.35,30.4 ; U1.19 14.35,30.4 ; 15.074,30.1 15.1,30.1 15.15,30.15 U1.17 ; U1.16 15.55,29.55 15.6,29.5 ; 15.9,28.7 15.9,30.2 15.95,30.25 U1.15 ; U1.14 16.35,29.75 v2@16.4,29.7 ; U1.39 17.15,27.05 17.35,27.05 17.4,27 17.4,26.8 17.5,26.7 17.5,26.675 17.55,26.625 U1.40 ; U1.12 17.15,30.25 17.2,30.2 17.5,30.5 ; U1.11 17.55,30.55 17.5,30.5 ; U1.10 17.5,30.5 ; CON2.0@31.395,13.005 CON2.0
  Top Layer w0.23: v2(19.1,14.4) 19.173,14.473 19.845,14.473 19.972,14.6 U4.B2 ; v2(20.4,16.5) 20.291,16.391 20.291,16.091 19.995,15.795 19.995,15.605 20.2,15.4 U4.D2 ; U4.C1 21.9,15 22,15.1 22,15.146 22.3,15.446 v2(22.3,15.65)
  Top Layer w0.35: CON3.0 0.058,29.3 1.5,29.3 1.6,29.2 ; v2(3.1,31.8) 3.186,31.714 3.43,31.714 3.994,31.15 Y1.4 Y1.4@4.16,31.15 ; v2(4.9,4) 4.9,5.249 C16.2 ; C4.2 5.479,28.5 5.286,28.692 5.286,28.864 5.609,29.187 6.037,29.187 Y1.2 Y1.2@6.037,29.713 ; v2(5.784,12.116) 5.796,12.104 R7.2 ; v2(6.9,26.7) 6.986,26.614 7.297,26.614 7.811,26.1 C7.2 ; v2(6.95,2.125) 6.95,3.95 7.213,4.213 7.213,6.359 C17.2 ; C9.2@7.7,28.7 7.186,28.186 6.986,28.186 v2(6.9,28.1) 6.986,28.014 7.208,28.014 7.721,27.5 C8.2 ; v2(7.9,3.8) C18.2 C18.2@8.647,3.85 ; C5.2 8.492,30.992 9.17,30.992 9.192,31.014 9.414,31.014 v2(9.5,31.1) ; v2(9.55,22.025) 9.55,22.088 9.9,22.438 C11.2 ; v2(10,27.8) 10.05,27.85 10.671,27.85 C3.1 ; v2(10.1,25.55) 10.222,25.55 10.595,25.923 C10.2 ; C12.2@11.675,29.025 C12.2@11.746,29.096 ; v2(12.831,22.683) 12.986,22.683 12.986,22.886 13.298,23.198 R1.1 ; C19.2 C20.1 14.89,5.636 14.89,7.264 C22.2 14.89,7.336 14.89,9.064 C21.2 C23.1 ; v2(17.725,19.425) 17.737,19.413 18.759,19.413 C15.2 ; v2(17.8,17.7) C14.2 C14.2@18.791,17.72 ; C6.1 18.479,24.45 19.25,24.45 v2(19.269,24.469) ; v2(19.6,3.725) DS1.2 ; C13.2 21.177,12.65 22.05,12.65 v2(22.1,12.7) ; R2.1 21.85,25.35 22.55,25.35 v2(22.6,25.4) ; DS2.2 22.025,5.5 22.025,3.75 v2(22.05,3.725) ; CON2.4@31.38,2.52 CON2.4@31.4,2.54
  other v1: 21.175,1.75 5.025,1.775 28.9,3.825 1.475,3.95 1.35,6.525 30.4,6.575 23.75,8.7 1.225,9 30.475,9.05 30.475,11.612 1.325,11.725 17.325,15.15 1.325,15.6 6.15,16.95 11.375,17.05 30,18.05 16.375,21.15 26.325,21.6 2.575,22.15 29.7,24.425 4.425,25.175 25.45,27.675 28.275,30.425 19.7,30.625 10.7,31.8 9.815,31.954 21.64,31.954 5.551,32.053 7.259,32.053 8.113,32.053 8.967,32.053 11.527,32.053 12.381,32.053 13.235,32.053 18.065,32.053 18.919,32.053 19.773,32.053 20.627,32.053 22.489,32.053 23.343,32.053 24.197,32.053 25.051,32.053 25.905,32.053 6.4,32.1 15.312,32.097 26.753,32.154 4.705,32.172 16.29,32.343 27.47,32.618 4,32.654 14.862,32.822 16.841,32.995 14.133,33.267 10.221,33.332 17.631,33.321 5.961,33.347 6.815,33.347 7.669,33.347 8.523,33.347 11.575,33.347 12.429,33.347 13.283,33.347 18.484,33.347 19.338,33.347 20.192,33.347 21.325,33.363 23.028,33.347 23.882,33.347 24.736,33.347 25.59,33.347 27.88,33.367 3.605,33.411 5.109,33.406 9.373,33.432 22.177,33.422 26.439,33.436 15.675,33.9 5.6,34.15 3.025,34.175 28.7,34.2 26,34.3
  other v2: 15.6,27.7 5.2,28.9 12.5,29.065 15,29.5 16.7,29.5
IRQ: CON2.1 R2.2 U1.1 | length 27.2
  Top Layer w0.17: U1.1@17.8,26.9 19.1,26.9 20.6,25.4 R2.2 20.996,25.398 21.145,25.249 21.147,25.249 22.496,23.9 27.7,23.9 29.2,22.4 29.2,11 29.87,10.33 31.37,10.33 CON2.1
LED1: R3.2 U1.6 | length 31.6
  Top Layer w0.17: U1.6 20.9,28.9 21.6,29.6 25.5,29.6 26.8,28.3 v1(26.8,24.8) ; R3.2 R3.2 19.751,9.353 19.751,9.356 25.2,14.804 v1(25.2,20.1)
  Bottom Layer w0.17: v1(25.2,20.1) 25.2,22.3 26.8,23.9 v1(26.8,24.8)
LED2: R4.2 U1.7 | length 32.2
  Top Layer w0.17: U1.7 20.8,29.3 21.5,30 25.8,30 28,27.8 v1(28,24.8) ; R4.2@21.95,9.302 R4.2 22,10.9 25.9,14.8 v1(25.9,19.5)
  Bottom Layer w0.17: v1(25.9,19.5) 28,21.6 v1(28,24.8)
MISO: CON2.2 U1.36 | length 33.1
  Top Layer w0.17: U1.36 15.95,25.258 15.95,23.65 16.1,23.5 27.4,23.5 28.8,22.1 28.8,7.9 28.9,7.8 CON2.2@31.5,7.8
MOSI: CON2.3 U1.35 | length 35.7
  Top Layer w0.17: U1.35 15.55,23.45 16,23 27.2,23 28.4,21.8 28.4,5.768 29.047,5.121 31.359,5.121 CON2.3@31.4,5.08
Net*2_1: *2.1 U1.3 | length 6.3
  Top Layer w0.17: U1.3 21.601,27.7 21.7,27.7 22.9,26.5 *2.1
Net*3_1: *3.1 U1.4 | length 5
  Top Layer w0.17: U1.4 21.6,28.1 21.9,28.4 *3.1
NetC1_1: C1.1 U1.18 | length 5.6
  Top Layer w0.145: C1.1 13.6,32.7 cw(c13.6,31.55) 14.75,31.55 U1.18
NetC1_2: C1.2 U2.1 | length 8.6
  Top Layer w0.145: U2.1 4.2,33.829 ccw(c5.329,33.829) 5.329,32.7 C1.2
NetC2_1: C2.1 U1.13 | length 5.6
  Top Layer w0.145: U1.13 16.75,31.55 cw(c17.9,31.55) 17.9,32.7 C2.1
NetC2_2: C2.2 U3.1 | length 8.6
  Top Layer w0.145: C2.2 26.171,32.7 ccw(c26.171,33.829) 27.3,33.829 U3.1
NetC3_2: C3.2 U1.27 | length 2
  Top Layer w0.17: C3.2 11.531,27.952 11.892,27.952 12.019,28.08 12.908,28.08 12.922,28.094 13.344,28.094 U1.27
NetC6_2: C6.2 U1.38 | length 2.2
  Top Layer w0.17: U1.38 16.75,25.3 17.55,24.5 C6.2
NetC7_1: C7.1 C8.1 C9.1 C13.1 FB1.1 R9.1 U1.23 U4.A2 U4.D1 | length 23.8
  Top Layer w0.17: C7.1 8.6,26.7 8.7,26.8 ; FB1.1@9.75,26.8 8.7,26.8 ; U1.23 9.7,29.7 8.7,28.7 8.7,27.5 8.7,26.8 ; 20,14.089 20,12.944 20.006,12.938 20.006,12.844 20.25,12.6 C13.1 ; U4.A2@20.478,14.189 U4.A2 ; 21.4,15.4 21.6,15.6 v1(21.6,16.7)
  Top Layer w0.2: v2(7.8,25.1) 8.386,25.686 8.386,25.897 8.389,25.9 C7.1@8.6,25.9 ; C7.1 C7.1@8.6,25.9 ; v2(9.1,25) 9.1,25.117 8.8,25.417 8.8,25.897 8.797,25.9 C7.1@8.6,25.9 ; v2(10.2,13.8) 10.315,13.685 10.315,13.385 10.698,13.002 R9.1 R9.1 11.185,13.485 11.185,13.685 v2(11.3,13.8) ; v1(19.3,12.5) 20.273,12.5 C13.1
  Top Layer w0.23: 20,14.089 20.1,14.189 U4.A2@20.478,14.189 ; U4.D1 21.4,15.4
  Bottom Layer w0.2: v1(19.3,12.5) 21.6,14.8 v1(21.6,16.7)
NetC10_1: C10.1 FB1.2 U1.28 | length 3.3
  Top Layer w0.17: FB1.2@10.45,26.8 10.9,26.8 11.5,26.8 12.4,27.7 U1.28
NetC11_1: C11.1 R8.1 U1.29 | length 21.4
  Top Layer w0.17: U1.29 13.344,27.294 12.894,27.294 12.5,26.9 12.5,25.775 11.86,25.135 11.478,25.135 10.643,24.3 10.1,24.3 C11.1 9.96,24.1 9.96,24.018 10.101,23.877 10.183,23.877 10.275,23.786 10.284,23.786 10.421,23.648 10.421,23.639 10.725,23.335 10.725,19.875 12.6,18 v1(14.7,18) ; R8.1 v1(15.5,12.4)
  Bottom Layer w0.17: v1(14.7,18) 15.5,17.2 v1(15.5,12.4)
NetC16_1: C16.1 C17.1 R5.2 R6.2 U5.3 U5.5 | length 15.8
  Top Layer w0.17: R5.2 4.526,9.7 4.976,9.25 v1(5.026,9.2) R6.2 ; v1@4.926,9.2 C16.1 5.028,7.229 C17.1 7.397,7.4 8.4,7.4 8.626,7.174 ; U5.5@9.1,5.974 U5.5
  Top Layer w0.2: U5.3 8.626,7.174 ; v1(9.1,5.3) U5.5@9.1,5.974
  Bottom Layer w0.17: v1(5.026,9.2) 5.026,7.9 7.626,5.3 v1(9.1,5.3)
NetDS1_1: DS1.1 R3.1 | length 1.4
  Top Layer w0.17: DS1.1 R3.1
NetDS2_1: DS2.1 R4.1 | length 1.5
  Top Layer w0.17: DS2.1 R4.1
NetL1_1: L1.1 U4.A1 | length 5.3
  Top Layer w0.17: 23.6,14.2 23.9,14.5 L1.1@23.9,16.7
  Top Layer w0.23: U4.A1 23.6,14.2
NetL2_1: L2.1 U5.2 | length 3.4
  Top Layer w0.17: L2.1 8.5,8.026 9.126,7.4
  Top Layer w0.2: U5.2 9.126,7.4
NetR1_2: R1.2 U1.32 | length 2.7
  Top Layer w0.17: R1.2 13.3,24.8 14.35,25.85 U1.32
NetR6_1: R6.1 R7.1 U5.1 | length 6.9
  Top Layer w0.17: R7.1@6.5,11.2 R7.1@6.55,11.15 ; R7.1 R7.1@6.502,11.3 ; R7.1@6.528,11.098 6.726,10.9 R6.1 6.726,8.8 6.978,8.547 6.978,8.514 7.126,8.366 v1(7.126,8.25) ; U5.1@9.611,6.77 U5.1
  Top Layer w0.2: U5.1 v1(9.626,7.8)
  Bottom Layer w0.17: v1(7.126,8.25) 7.576,7.8 v1(9.626,7.8)
RESET: CON1.2 U1.33 | length 29.7
  Top Layer w0.17: v1(13.92,24.663) 13.963,24.663 14.75,25.45 U1.33
  Bottom Layer w0.17: CON1.2 1.92,7.82 2.5,8.4 2.5,17.6 5.6,20.7 12.3,20.7 13.92,22.32 v1(13.92,24.663)
SCK: CON1.3 U1.34 | length 32.6
  Top Layer w0.17: v1(14.8,23.464) 14.8,23.549 15.15,23.899 U1.34
  Bottom Layer w0.17: CON1.3 2,5.28 2.9,6.18 2.9,17.5 5.7,20.3 12.7,20.3 14.8,22.4 v1(14.8,23.464)
VCOM: CON1.1 R5.1 | length 4.8
  Top Layer w0.35: CON1.1 3.06,10.36 3.802,11.102 R5.1
VDD: *5.1 C18.1 C19.1 C20.2 L2.2 L3.1 R9.2 U5.6 | length 18.9
  Top Layer w0.35: U5.6 9.626,5.955 10.026,5.555 10.026,4.8 9.626,4.4 9.626,3.871 C18.1 *5.1 ; R9.2 10.7,10.049 L2.2 10.551,6.577 10.826,6.303 *5.1 ; L3.1@12.46,5.634 13.963,5.634 C20.2 C19.1 *5.1
VDD3: *4.1 C12.1 C14.1 C15.1 L1.2 U1.26 U4.C2 | length 16.1
  Top Layer w0.2: C12.1 10.826,28.946 10.826,28.513 10.953,28.386 11.852,28.386 11.881,28.415 12.769,28.415 12.854,28.5 U1.26
  Top Layer w0.23: C14.1 19.6,17.689 19.6,15.4 20,15 U4.C2
  Top Layer w0.25: v2@9.948,29 9.96,29.012 10.663,29.012 C12.1@10.675,29.025
  Top Layer w0.35: v2(9.924,29) v2@9.948,29 ; *4.1 C15.1 19.609,19.38 19.609,17.72 C14.1 21,17.7 21.676,18.376 L1.2 v2(23.5,19.8)
XTI: C5.1 U1.21 Y1.3 | length 8.3
  Top Layer w0.17: Y1.3@6.305,31.15 7.255,30.2 7.7,30.2 ; C5.1 7.673,30.227 7.7,30.2 ; U1.21 13.017,30.5 12.952,30.435 9.282,30.435 9.047,30.2 7.7,30.2
XTO: C4.1 U1.22 Y1.1 | length 11.6
  Top Layer w0.17: C4.1@4.642,27.88 4.62,27.88 4.549,27.951 4.549,27.973 4.1,28.421 Y1.1 4.75,30.1 5.73,30.1 5.805,30.175 6.795,30.175 7.17,29.8 9.1,29.8 9.4,30.1 U1.22
pads on no net: U1.2 U1.5 U1.8 U1.9 U2. U3.

## Polygon pours and split planes (outlines as drawn)
VDD on Top Layer "NONET_L-01_P-001" (solid, pour order 1): 11.6,8 12.226,8 12.639,7.3 12.625,6.3 14.4,6.3 14.4,3.3 9.1,3.3 9.1,6.4 9.9,6.4 9.9,12.4 11.6,12.4
GND on Top Layer "NONET_L-01_P-001" (solid, remove dead copper, pour order 4): 0,34.7 31.5,34.7 31.5,0 0,0
VDD3 on Top Layer "VDD3_L01_P005" (solid, pour order 5): 19.3,15.2 19.7,15.2 19.7,17.4 22.2,17.4 22.2,17.8 24.6,17.8 24.6,20.3 19.3,20.3
NetC7_1 on Top Layer "NONET_L-01_P-001" (solid, pour order 2): 9.7,14.3 11.7,14.3 11.7,12.8 9.7,12.8
NetC7_1 on Top Layer "NONET_L-01_P-001" (solid, pour order 0): 8.2,29.8 8.2,25.6 6.8,25.6 6.8,24.3 9.1,24.3 9.1,29.8
GND on Bottom Layer "GND_L04_P008" (solid, pour order 8): 0,34.8 31.5,34.8 31.5,0 0,0
no net on Top Solder "NONET_L01_P013" (solid): 16.55,31.825 16.55,31.747 16.55,30.65 16.675,30.525 16.85,30.525 16.95,30.625 16.95,31.95 cw(c17.227,31.974) 17.2,32.25 27.85,32.25 ccw(c27.85,33.475) 29.075,33.475 29.075,34.925 ccw(c28.575,34.925) 28.575,35.425 28.308,35.425 cw(c28.366,35.841) 27.95,35.9 26.65,35.9 cw(c26.3,35.85) 26.35,35.5 26.3,35.5 ccw(c26.3,34.739) 25.539,34.739 25.539,33.347 cw(c25.467,33.347) 25.467,33.275 17.85,33.275 ccw(c17.819,31.995)
no net on Top Solder "NONET_L01_P013" (solid): 14.95,31.801 14.95,31.724 14.95,30.626 14.825,30.501 14.65,30.501 14.55,30.601 14.55,31.926 ccw(c14.273,31.95) 14.3,32.226 3.65,32.226 cw(c3.65,33.451) 2.425,33.451 2.425,34.901 cw(c2.925,34.901) 2.925,35.401 3.192,35.401 ccw(c3.134,35.818) 3.55,35.876 4.85,35.876 ccw(c5.2,35.826) 5.15,35.476 5.2,35.476 cw(c5.2,34.715) 5.961,34.715 5.961,33.323 ccw(c6.033,33.323) 6.033,33.251 13.65,33.251 cw(c13.681,31.971)
VDD3 on Power (split plane): 30.99,13.527 17.753,13.527 16.427,14.853 16.427,20.5 16.418,20.549 16.39,20.59 10.59,26.39 10.549,26.418 10.5,26.427 10.153,26.427 9.327,27.253 9.327,29.647 10.69,31.01 10.718,31.051 10.719,31.059 10.727,31.1 10.727,34.7 30.99,34.7
NetC7_1 on Power (split plane): 10.473,31.153 9.11,29.79 9.082,29.749 9.073,29.7 9.073,27.2 9.082,27.151 9.11,27.11 10.01,26.21 10.051,26.182 10.059,26.181 10.1,26.173 10.447,26.173 16.173,20.447 16.173,14.8 16.182,14.751 16.21,14.71 17.61,13.31 17.651,13.282 17.659,13.281 17.7,13.273 30.99,13.273 30.99,0.51 0.51,0.51 0.51,34.7 10.473,34.7
GND on Ground (split plane): 30.99,0.51 0.51,0.51 0.51,34.8 30.99,34.8

## Other copper
Top Layer:
  region net GND: 17.5,30.5 14,30.5 14,26.9 17.5,26.9
  region net GND: 0,13.062 0,12.737 0.7,12.737 0.7,11.588 1.025,11.588 1.025,12.737 2.6,12.737 2.6,13.062 1.025,13.062 1.025,14.188 0.7,14.188 0.7,13.062
  region net GND: 0,26.865 0,26.54 0.7,26.54 0.7,25.39 1.025,25.39 1.025,26.54 2.6,26.54 2.6,26.865 1.025,26.865 1.025,27.99 0.7,27.99 0.7,26.865
  region net GND: 0,29.405 0,29.08 0.7,29.08 0.7,27.93 1.025,27.93 1.025,29.08 2.6,29.08 2.6,29.405 1.025,29.405 1.025,30.53 0.7,30.53 0.7,29.405
  region net GND: 31.5,29.077 31.5,29.402 30.8,29.402 30.8,30.552 30.475,30.552 30.475,29.402 28.9,29.402 28.9,29.077 30.475,29.077 30.475,27.952 30.8,27.952 30.8,29.077
  region net GND: 31.5,26.537 31.5,26.862 30.8,26.862 30.8,28.012 30.475,28.012 30.475,26.862 28.9,26.862 28.9,26.537 30.475,26.537 30.475,25.412 30.8,25.412 30.8,26.537
  region net GND: 31.5,12.737 31.5,13.062 30.8,13.062 30.8,14.212 30.475,14.212 30.475,13.062 29.825,13.062 29.825,12.737 30.475,12.737 30.475,11.612 30.8,11.612 30.8,12.737
  region net GND: 31.5,2.577 31.5,2.902 30.8,2.902 30.8,4.052 30.475,4.052 30.475,2.902 28.9,2.902 28.9,2.577 30.475,2.577 30.475,1.452 30.8,1.452 30.8,2.577
  region net GND: 13.937,0 14.262,0 14.262,0.7 15.412,0.7 15.412,1.025 14.262,1.025 14.262,2.6 13.937,2.6 13.937,1.025 12.812,1.025 12.812,0.7 13.937,0.7
  region net GND: 16.478,0 16.803,0 16.803,0.7 17.952,0.7 17.952,1.025 16.803,1.025 16.803,2.6 16.478,2.6 16.478,1.025 15.352,1.025 15.352,0.7 16.478,0.7
  pour cut-out: 14.762,0 14.762,1.774 14.411,2.126 13.789,2.126 13.438,1.774 13.438,0
  pour cut-out: 17.302,0 17.302,1.774 16.951,2.126 16.329,2.126 15.978,1.774 15.978,0
  pour cut-out: 31.5,3.402 29.726,3.402 29.374,3.051 29.374,2.429 29.726,2.078 31.5,2.078
  pour cut-out: 31.5,29.902 29.726,29.902 29.374,29.551 29.374,28.929 29.726,28.578 31.5,28.578
  pour cut-out: 31.5,27.362 29.726,27.362 29.374,27.011 29.374,26.389 29.726,26.038 31.5,26.038
  pour cut-out: 0,29.905 1.774,29.905 2.126,29.553 2.126,28.931 1.774,28.58 0,28.58
  pour cut-out: 0,27.365 1.774,27.365 2.126,27.013 2.126,26.391 1.774,26.04 0,26.04
  pour cut-out: 0,13.562 1.774,13.562 2.126,13.211 2.126,12.589 1.774,12.238 0,12.238
  pour cut-out: 31.5,13.562 29.726,13.562 29.374,13.211 29.374,12.589 29.726,12.238 31.5,12.238
  pour cut-out: 26.15,34.7 28.45,34.7 27.25,33.5
  pour cut-out: 5.35,34.7 3.05,34.7 4.25,33.5
  region net NetC1_2: 3.65,35.9 4.75,35.9 4.75,34.7 4.2,33.7 3.65,34.7
  region net NetC2_2: 26.75,35.9 27.85,35.9 27.85,34.7 27.3,33.7 26.75,34.7
Bottom Layer:
  region net GND: 0,29.405 0,29.08 0.7,29.08 0.7,27.93 1.025,27.93 1.025,29.08 2.6,29.08 2.6,29.405 1.025,29.405 1.025,30.53 0.7,30.53 0.7,29.405
  region net GND: 0,26.865 0,26.54 0.7,26.54 0.7,25.39 1.025,25.39 1.025,26.54 2.6,26.54 2.6,26.865 1.025,26.865 1.025,27.99 0.7,27.99 0.7,26.865
  region net GND: 0,13.062 0,12.737 0.7,12.737 0.7,11.588 1.025,11.588 1.025,12.737 2.126,12.737 2.126,13.062 1.025,13.062 1.025,14.188 0.7,14.188 0.7,13.062
  region net GND: 13.938,0 14.263,0 14.263,0.7 15.412,0.7 15.412,1.025 14.263,1.025 14.263,2.6 13.938,2.6 13.938,1.025 12.812,1.025 12.812,0.7 13.938,0.7
  region net GND: 16.478,0 16.803,0 16.803,0.7 17.952,0.7 17.952,1.025 16.803,1.025 16.803,2.6 16.478,2.6 16.478,1.025 15.352,1.025 15.352,0.7 16.478,0.7
  region net GND: 31.5,2.578 31.5,2.903 30.8,2.903 30.8,3.65 30.475,3.65 30.475,2.903 28.9,2.903 28.9,2.578 30.475,2.578 30.475,1.452 30.8,1.452 30.8,2.578
  region net GND: 31.5,12.738 31.5,13.063 30.8,13.063 30.8,14.212 30.475,14.212 30.475,13.063 28.9,13.063 28.9,12.738 30.475,12.738 30.475,11.612 30.8,11.612 30.8,12.738
  region net GND: 31.5,26.538 31.5,26.863 30.8,26.863 30.8,28.012 30.475,28.012 30.475,26.863 28.9,26.863 28.9,26.538 30.475,26.538 30.475,25.412 30.8,25.412 30.8,26.538
  region net GND: 31.5,29.078 31.5,29.403 30.8,29.403 30.8,30.552 30.475,30.552 30.475,29.403 28.9,29.403 28.9,29.078 30.475,29.078 30.475,27.952 30.8,27.952 30.8,29.078
  pour cut-out: 0,28.58 1.774,28.58 2.126,28.931 2.126,29.553 1.774,29.905 0,29.905
  pour cut-out: 0,26.04 1.774,26.04 2.126,26.391 2.126,27.013 1.774,27.365 0,27.365
  pour cut-out: 0,12.238 1.774,12.238 2.126,12.589 2.126,13.211 1.774,13.562 0,13.562
  pour cut-out: 14.762,0 14.762,1.774 14.411,2.126 13.789,2.126 13.438,1.774 13.438,0
  pour cut-out: 17.302,0 17.302,1.774 16.951,2.126 16.329,2.126 15.978,1.774 15.978,0
  pour cut-out: 31.5,3.402 29.726,3.402 29.374,3.051 29.374,2.429 29.726,2.078 31.5,2.078
  pour cut-out: 31.5,13.562 29.726,13.562 29.374,13.211 29.374,12.589 29.726,12.238 31.5,12.238
  pour cut-out: 31.5,29.902 29.726,29.902 29.374,29.551 29.374,28.929 29.726,28.578 31.5,28.578
  pour cut-out: 31.5,27.362 29.726,27.362 29.374,27.011 29.374,26.389 29.726,26.038 31.5,26.038
  text "DW3000 R1.1" at 24.53,7.37 h0.7
  text "milkelle / apr 22" at 24.63,6.103 h0.7
  text "L4" at 11.255,0.795 h0.7
Ground (plane layer: these items are gaps in the copper):
  rectangle: 0,34.8 31.5,45
  text "L2" at 5.17,0.87 h0.7
Power (plane layer: these items are gaps in the copper):
  rectangle: 0,34.7 31.4,44.9
  lines w0.25: 10.6,35.1 10.6,31.1 9.2,29.7 9.2,27.2 10.1,26.3 10.5,26.3 16.3,20.5 16.3,14.8 17.7,13.4 31.6,13.4